# Allegro board LED_V1.0-1012.brd
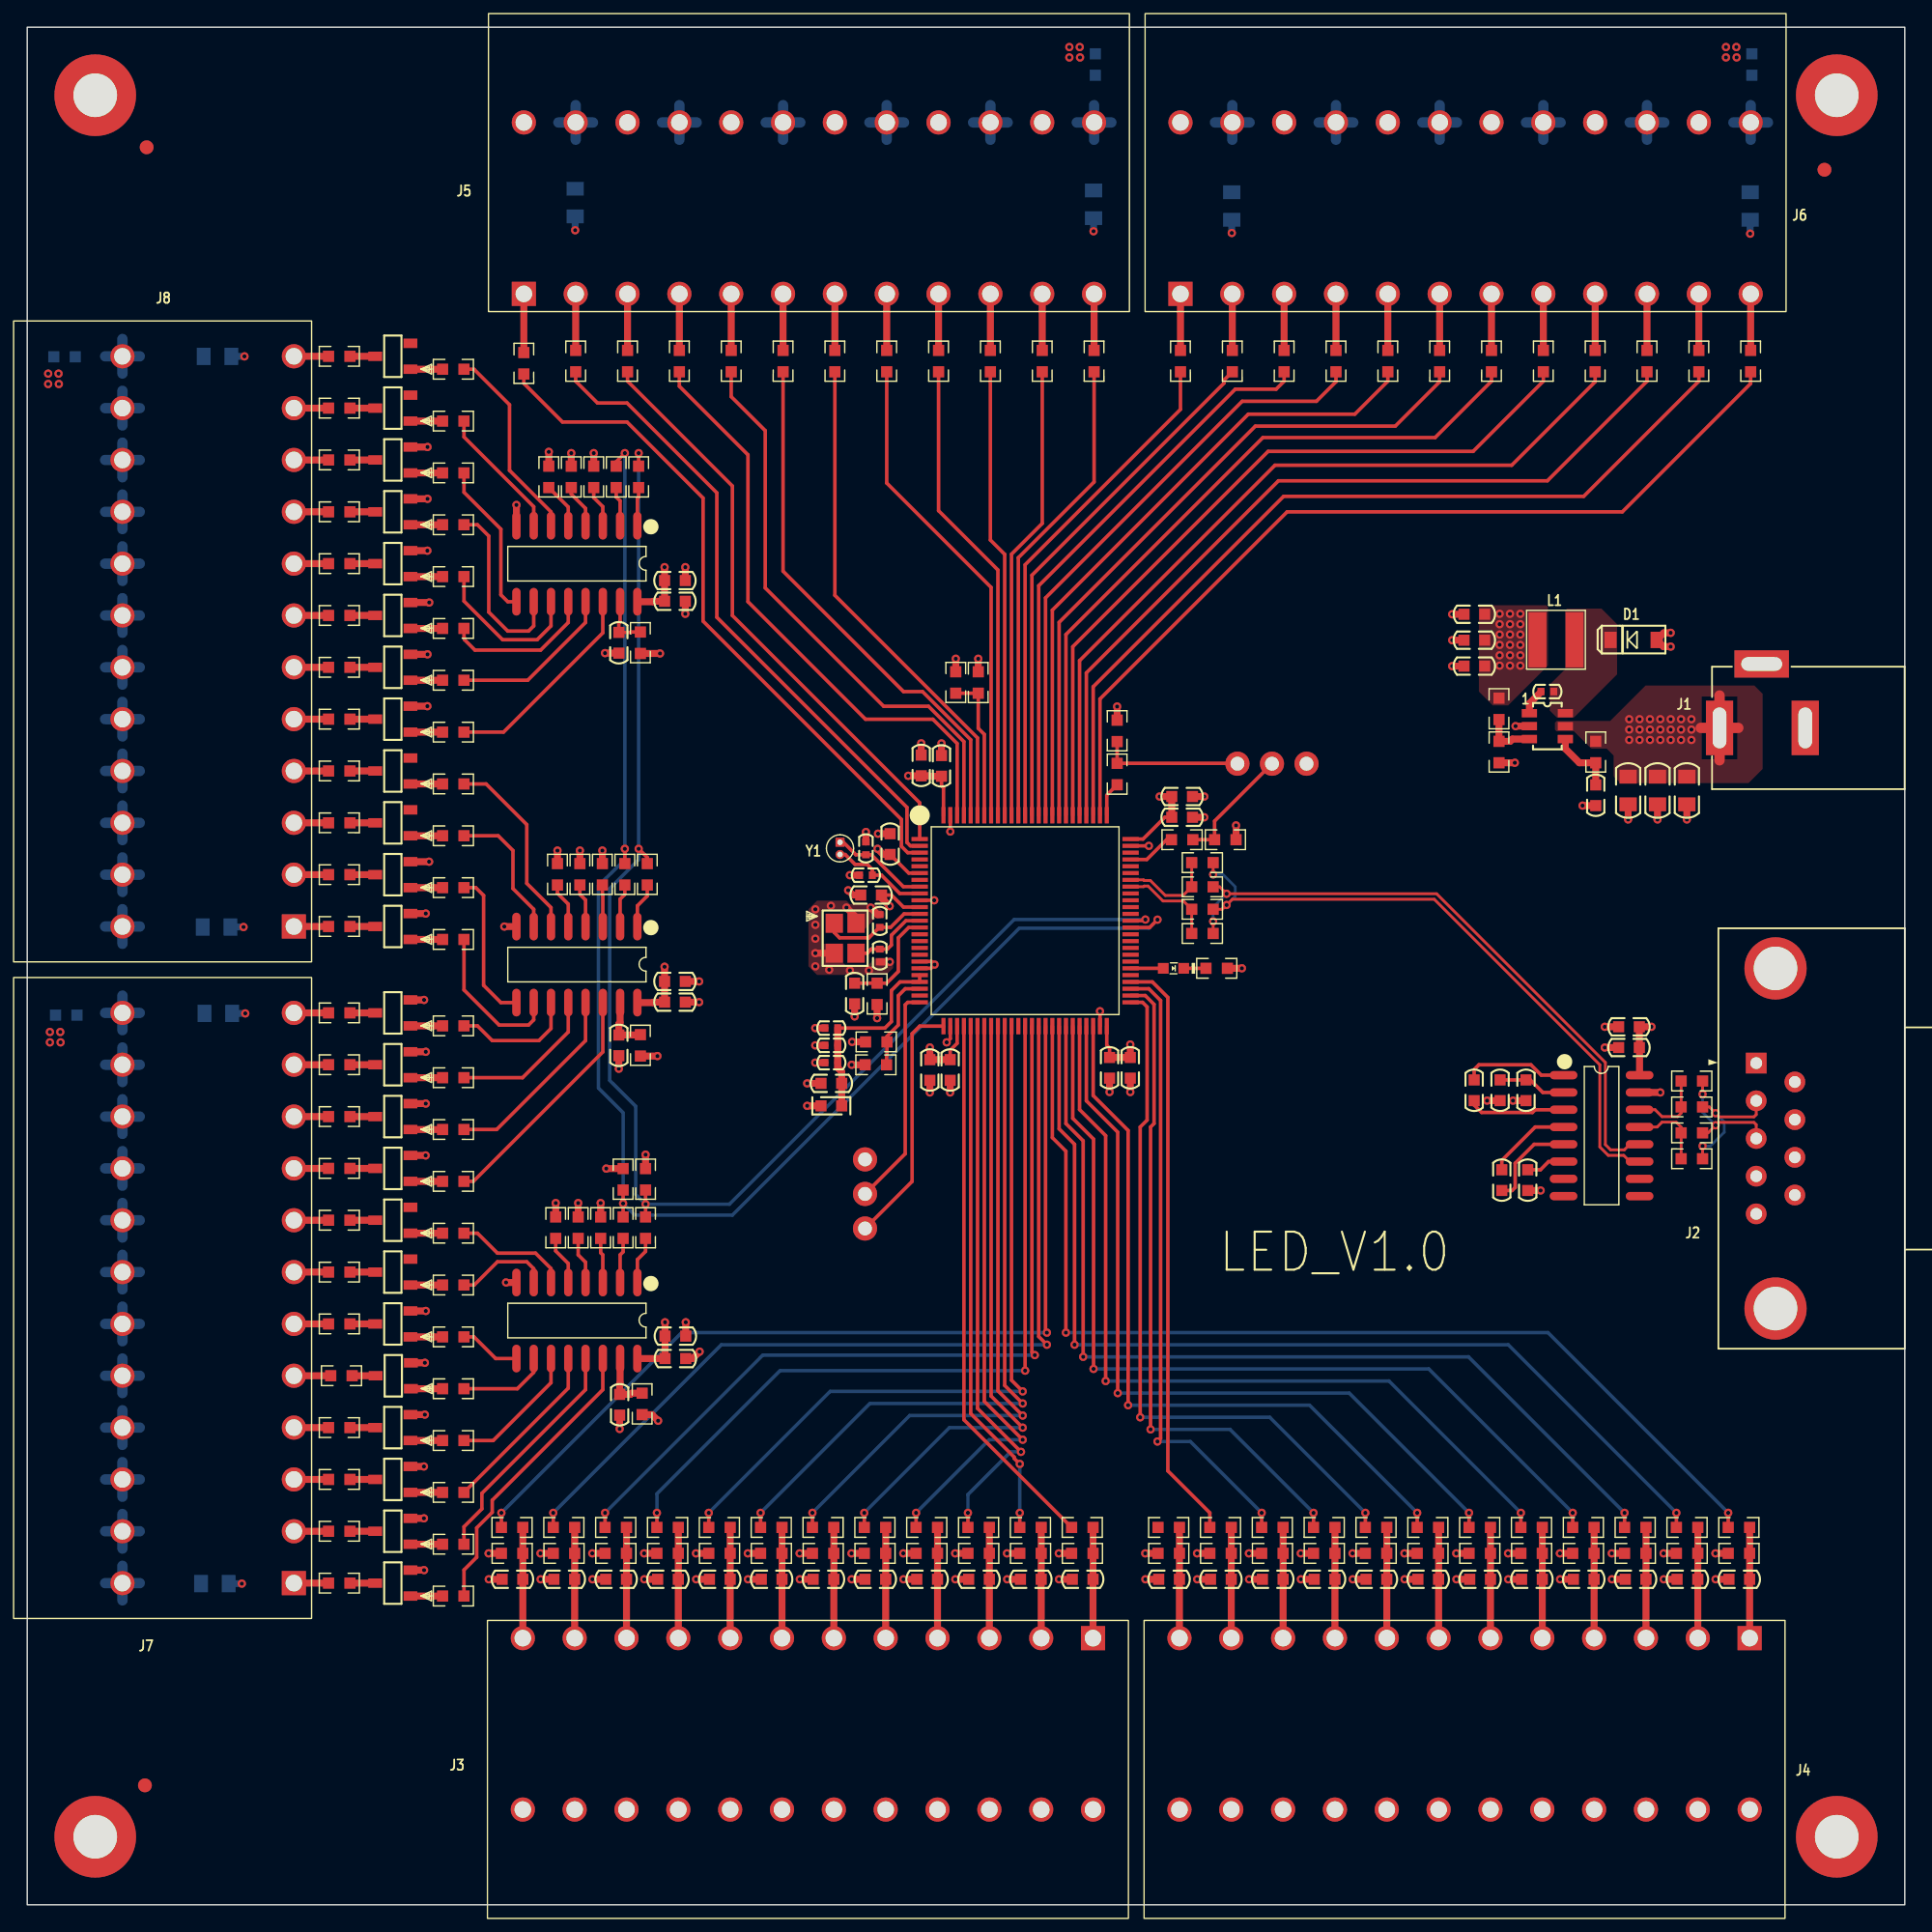
[diagram p0: board, top side]
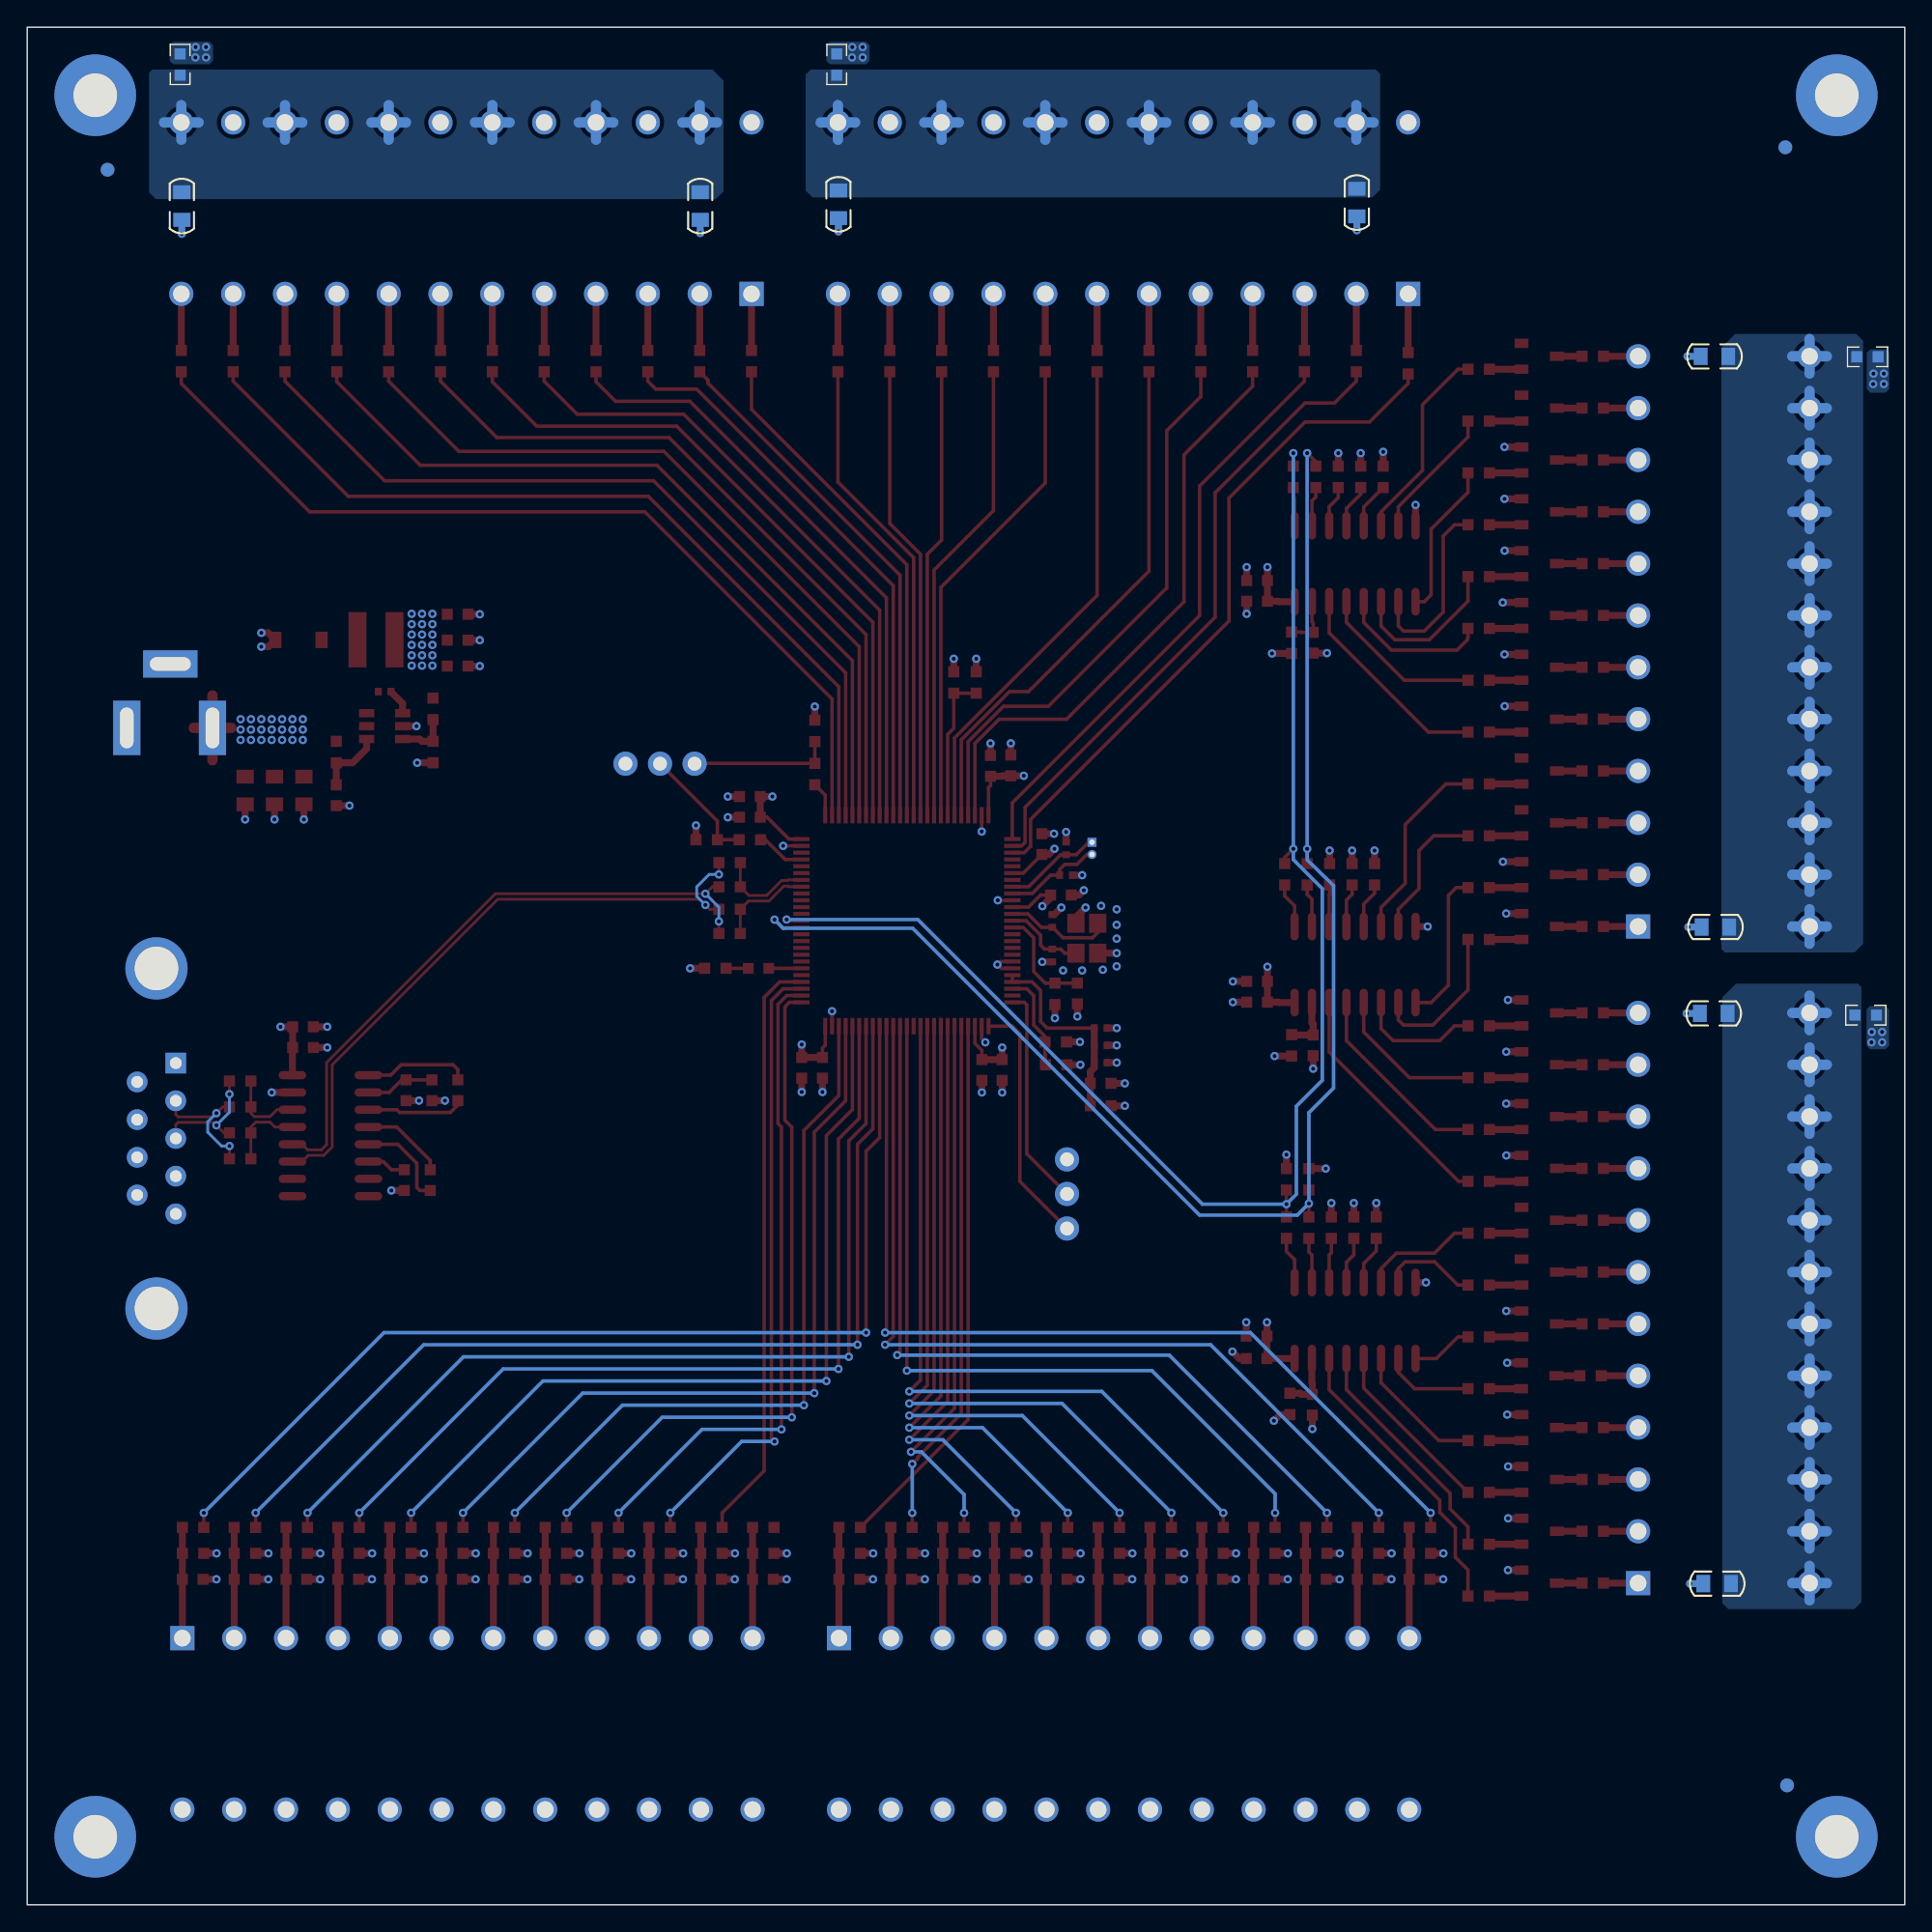
[diagram p1: board, bottom side, seen from below]

Outline 138 x 138 mm; copper layers: TOP, GND, VCC, BOTTOM. Coordinates in mm from the lower left corner of the outline.
Outline path: rectangle 0,0 138,138

## Design rules (mm)
net group DP1: nets RX TX
net group DP2: nets N9947380 N9947430
net group DP3: nets N9930446 N9930462
net group DP4: nets N9946592 N9946643

## Placement (name value [footprint] x y rotation side)
C1  100nF  [A183_C_0402_H50]  111.73 89.17 0 top
C2  1uF  [C0805]  121.98 81.9 270 top
C3  1uF  [C0805]  119.82 81.9 270 top
C4  1uF  [C0805]  117.67 81.9 270 top
C5  10uF  [C0603]  106.36 94.85 0 top
C6  10uF  [C0603]  106.36 92.95 0 top
C7  10uF  [C0603]  106.36 91.04 0 top
C8  100nF  [C0603]  117.73 63.01 180 top
C9  100nF  [C0603]  117.73 64.53 180 top
C10  100nF  [C0603]  108.25 59.87 270 top
C11  100nF  [C0603]  110.16 59.87 90 top
C12  100nF  [C0603]  106.35 59.87 270 top
C13  100nF  [C0603]  108.38 53.26 270 top
C14  100nF  [C0603]  110.28 53.26 270 top
C15  10pF  [C0402]  61.64 77.65 270 top
C16  10pF  [C0402]  61.64 75.68 0 top
C17  10pF  [C0402]  62.66 72.31 270 top
C18  10pF  [C0402]  62.66 69.77 90 top
C19  10uF  [C0603]  59.1 60.37 0 top
C20  0.10uF  [C0402]  59.1 61.9 0 top
C21  0.10uF  [C0402]  59.1 63.17 0 top
C22  0.10uF  [C0402]  59.1 64.44 0 top
C23  0.10uF  [C0603]  60.82 66.98 90 top
C24  10uF  [C0603]  79.55 61.52 90 top
C25  10uF  [C0603]  84.88 81.46 180 top
C26  10uF  [C0603]  81.07 61.52 90 top
C27  10uF  [C0603]  62.02 74.22 0 top
C28  10uF  [C0603]  65.71 83.74 270 top
C29  10uF  [C0603]  67.83 61.36 90 top
C30  10uF  [C0603]  67.2 83.71 270 top
C31  10uF  [C0603]  63.42 77.96 270 top
C32  10uF  [C0603]  66.34 61.36 90 top
C33  10uF  [C0603]  84.88 79.93 180 top
C34  100nF  [C0603]  77.57 23.92 180 top
C35  100nF  [C0603]  73.76 23.92 180 top
C36  100nF  [C0603]  69.95 23.92 180 top
C37  100nF  [C0603]  66.14 23.92 180 top
C38  100nF  [C0603]  62.33 23.92 180 top
C39  100nF  [C0603]  58.52 23.92 180 top
C40  100nF  [C0603]  54.71 23.92 180 top
C41  100nF  [C0603]  50.9 23.92 180 top
C42  100nF  [C0603]  47.09 23.92 180 top
C43  100nF  [C0603]  43.28 23.92 180 top
C44  100nF  [C0603]  39.47 23.92 180 top
C45  100nF  [C0603]  35.66 23.92 180 top
C46  100nF  [C0603]  125.83 23.92 180 top
C47  100nF  [C0603]  122.02 23.92 180 top
C48  100nF  [C0603]  118.21 23.92 180 top
C49  100nF  [C0603]  114.4 23.92 180 top
C50  100nF  [C0603]  110.59 23.92 180 top
C51  100nF  [C0603]  106.78 23.92 180 top
C52  100nF  [C0603]  102.97 23.92 180 top
C53  100nF  [C0603]  99.16 23.92 180 top
C54  100nF  [C0603]  95.35 23.92 180 top
C55  100nF  [C0603]  91.54 23.92 180 top
C56  100nF  [C0603]  87.73 23.92 180 top
C57  100nF  [C0603]  83.92 23.92 180 top
C58  100nF  [C0603]  47.64 41.8 0 top
C59  100nF  [C0603]  47.64 40.15 0 top
C60  100nF  [C0603]  43.54 36.75 270 top
C61  100nF  [C0603]  47.61 66.34 0 top
C62  100nF  [C0603]  47.61 67.87 0 top
C63  100nF  [C0603]  43.48 63.17 270 top
C64  100nF  [C0603]  47.61 95.81 0 top
C65  100nF  [C0603]  47.61 97.33 0 top
C66  100nF  [C0603]  43.48 92.76 270 top
C67  1uF  [C0805]  40.28 125.11 270 bottom
C68  1uF  [C0805]  78.38 124.98 270 bottom
C69  1uF  [C0805]  88.54 124.86 270 bottom
C70  1uF  [C0805]  126.64 124.86 270 bottom
C71  1uF  [C0805]  14.05 65.52 0 bottom
C72  1uF  [C0805]  13.79 23.61 0 bottom
C73  1uF  [C0805]  13.92 71.87 0 bottom
C74  1uF  [C0805]  13.99 113.81 0 bottom
D1  MBR0560T1  [SOD123-36X48]  118.07 92.97 0 top
FB1  600ohm  [L0603]  59.1 58.72 0 top
J1  -  [POWER_JACK]  131.51 86.5 0 top
J2  -  [DB9]  132.59 56.32 270 top
J3  12PIN*2  [2D5X2]  57.64 10.99 0 top
J4  12PIN*2  [2D5X2]  105.9 10.99 0 top
J5  12PIN*2  [2D5X2]  57.2 127.01 180 top
J6  12PIN*2  [2D5X2]  105.46 127.01 180 top
J7  12PIN*2  [2D5X2]  10.99 44.34 270 top
J8  12PIN*2  [2D5X2]  10.99 92.6 270 top
L1  22uH  [TSOT-6L]  112.36 92.98 270 top
LED1  LTST-C191KGKT  [LED0603]  84.25 68.83 180 top
NOREF  -  [unnamed]  132.1 127.52 0 top
NOREF#2  -  [unnamed#2]  133 133 0 top
NOREF#3  -  [unnamed#2]  5 133 0 top
NOREF#4  -  [unnamed]  8.65 8.78 0 top
NOREF#5  -  [unnamed]  8.78 129.18 0 top
NOREF#6  -  [unnamed#2]  133 5 0 top
NOREF#7  -  [unnamed#2]  5 5 0 top
NOREF#8  -  [unnamed]  132.1 127.52 180 bottom
NOREF#9  -  [unnamed]  8.65 8.78 180 bottom
NOREF#10  -  [unnamed]  8.78 129.18 180 bottom
PC1  NI/0.10uF  [C0603]  115.29 81.55 270 top
PU1  SN1501020DDCR  [SOT-23-6PS1]  111.73 86.63 270 top
Q1  SST3904  [A098_SOT23_3_H115]  26.87 23.64 180 top
Q2  SST3904  [A098_SOT23_3_H115]  26.87 27.45 180 top
Q3  SST3904  [A098_SOT23_3_H115]  26.87 31.26 180 top
Q4  SST3904  [A098_SOT23_3_H115]  26.87 35.07 180 top
Q5  SST3904  [A098_SOT23_3_H115]  26.91 38.88 180 top
Q6  SST3904  [A098_SOT23_3_H115]  26.87 42.69 180 top
Q7  SST3904  [A098_SOT23_3_H115]  26.87 46.5 180 top
Q8  SST3904  [A098_SOT23_3_H115]  26.87 50.31 180 top
Q9  SST3904  [A098_SOT23_3_H115]  26.87 54.12 180 top
Q10  SST3904  [A098_SOT23_3_H115]  26.87 57.93 180 top
Q11  SST3904  [A098_SOT23_3_H115]  26.87 61.74 180 top
Q12  SST3904  [A098_SOT23_3_H115]  26.87 65.55 180 top
Q13  SST3904  [A098_SOT23_3_H115]  26.87 71.9 180 top
Q14  SST3904  [A098_SOT23_3_H115]  26.87 75.71 180 top
Q15  SST3904  [A098_SOT23_3_H115]  26.87 79.52 180 top
Q16  SST3904  [A098_SOT23_3_H115]  26.87 83.33 180 top
Q17  SST3904  [A098_SOT23_3_H115]  26.87 87.14 180 top
Q18  SST3904  [A098_SOT23_3_H115]  26.87 90.95 180 top
Q19  SST3904  [A098_SOT23_3_H115]  26.87 94.76 180 top
Q20  SST3904  [A098_SOT23_3_H115]  26.87 98.57 180 top
Q21  SST3904  [A098_SOT23_3_H115]  26.87 102.38 180 top
Q22  SST3904  [A098_SOT23_3_H115]  26.87 106.19 180 top
Q23  SST3904  [A098_SOT23_3_H115]  26.87 110 180 top
Q24  SST3904  [A098_SOT23_3_H115]  26.87 113.81 180 top
R1  10k  [R0603]  115.29 84.73 270 top
R2  33.2k  [R0603]  108.17 87.9 270 top
R3  10k  [R0603]  108.17 84.73 270 top
R4  NI/100k  [R0603]  122.35 60.55 0 top
R5  NI/100k  [R0603]  122.35 58.64 0 top
R6  NI/100k  [R0603]  122.35 56.74 0 top
R7  NI/100k  [R0603]  122.35 54.83 0 top
R8  NI/100k  [R0603]  80.11 83.11 90 top
R9  NI/100k  [R0603]  84.88 78.28 0 top
R10  NI/100k  [R0603]  86.38 76.6 0 top
R11  NI/100k  [R0603]  86.38 74.82 0 top
R12  NI/100k  [R0603]  86.38 73.17 0 top
R13  NI/100k  [R0603]  86.38 71.39 0 top
R14  100k  [R0603]  62.47 66.95 90 top
R15  NI/100k  [R0603]  68.25 89.84 270 top
R16  100k  [R0603]  69.9 89.84 90 top
R17  NI/100k  [R0603]  62.41 63.42 0 top
R18  100k  [R0603]  62.37 61.74 180 top
R19  NI/100k  [R0603]  80.11 86.28 270 top
R20  NI/100k  [R0603]  88.06 78.28 180 top
R21  NI/100k  [R0603]  87.42 68.83 180 top
R22  33.2k  [R0603]  77.55 25.83 180 top
R23  33.2k  [R0603]  73.74 25.83 180 top
R24  33.2k  [R0603]  69.93 25.83 180 top
R25  33.2k  [R0603]  66.12 25.83 180 top
R26  33.2k  [R0603]  62.31 25.83 180 top
R27  33.2k  [R0603]  58.5 25.83 180 top
R28  33.2k  [R0603]  54.69 25.83 180 top
R29  33.2k  [R0603]  50.88 25.83 180 top
R30  33.2k  [R0603]  47.07 25.83 180 top
R31  33.2k  [R0603]  43.26 25.83 180 top
R32  33.2k  [R0603]  39.45 25.83 180 top
R33  33.2k  [R0603]  35.64 25.83 180 top
R34  33.2k  [R0603]  77.55 27.73 0 top
R35  33.2k  [R0603]  73.74 27.73 0 top
R36  33.2k  [R0603]  69.93 27.73 0 top
R37  33.2k  [R0603]  66.12 27.73 0 top
R38  33.2k  [R0603]  62.31 27.73 0 top
R39  33.2k  [R0603]  58.5 27.73 0 top
R40  33.2k  [R0603]  54.69 27.73 0 top
R41  33.2k  [R0603]  50.88 27.73 0 top
R42  33.2k  [R0603]  47.07 27.73 0 top
R43  33.2k  [R0603]  43.26 27.73 0 top
R44  33.2k  [R0603]  39.45 27.73 0 top
R45  33.2k  [R0603]  35.64 27.73 0 top
R46  33.2k  [R0603]  125.81 25.83 180 top
R47  33.2k  [R0603]  122 25.83 180 top
R48  33.2k  [R0603]  118.19 25.83 180 top
R49  33.2k  [R0603]  114.38 25.83 180 top
R50  33.2k  [R0603]  110.57 25.83 180 top
R51  33.2k  [R0603]  106.76 25.83 180 top
R52  33.2k  [R0603]  102.95 25.83 180 top
R53  33.2k  [R0603]  99.14 25.83 180 top
R54  33.2k  [R0603]  95.33 25.83 180 top
R55  33.2k  [R0603]  91.52 25.83 180 top
R56  33.2k  [R0603]  87.71 25.83 180 top
R57  33.2k  [R0603]  83.9 25.83 180 top
R58  33.2k  [R0603]  125.81 27.73 0 top
R59  33.2k  [R0603]  122 27.73 0 top
R60  33.2k  [R0603]  118.19 27.73 0 top
R61  33.2k  [R0603]  114.38 27.73 0 top
R62  33.2k  [R0603]  110.57 27.73 0 top
R63  33.2k  [R0603]  106.76 27.73 0 top
R64  33.2k  [R0603]  102.95 27.73 0 top
R65  33.2k  [R0603]  99.14 27.73 0 top
R66  33.2k  [R0603]  95.33 27.73 0 top
R67  33.2k  [R0603]  91.52 27.73 0 top
R68  33.2k  [R0603]  87.71 27.73 0 top
R69  33.2k  [R0603]  83.9 27.73 0 top
R70  33.2k  [R0603]  36.5 113.3 90 top
R71  33.2k  [R0603]  40.31 113.46 90 top
R72  33.2k  [R0603]  44.12 113.46 90 top
R73  33.2k  [R0603]  47.93 113.46 90 top
R74  33.2k  [R0603]  51.74 113.46 90 top
R75  33.2k  [R0603]  55.55 113.46 90 top
R76  33.2k  [R0603]  59.36 113.46 90 top
R77  33.2k  [R0603]  63.17 113.46 90 top
R78  33.2k  [R0603]  66.98 113.46 90 top
R79  33.2k  [R0603]  70.79 113.46 90 top
R80  33.2k  [R0603]  74.6 113.46 90 top
R81  33.2k  [R0603]  78.41 113.46 90 top
R82  33.2k  [R0603]  92.38 113.46 90 top
R83  33.2k  [R0603]  96.19 113.46 90 top
R84  33.2k  [R0603]  84.76 113.46 90 top
R85  33.2k  [R0603]  88.57 113.46 90 top
R86  33.2k  [R0603]  100 113.46 90 top
R87  33.2k  [R0603]  103.81 113.46 90 top
R88  33.2k  [R0603]  107.62 113.46 90 top
R89  33.2k  [R0603]  111.43 113.46 90 top
R90  33.2k  [R0603]  115.24 113.46 90 top
R91  33.2k  [R0603]  119.05 113.46 90 top
R92  33.2k  [R0603]  122.86 113.46 90 top
R93  33.2k  [R0603]  126.67 113.46 90 top
R94  33.2k  [R0603]  22.94 23.64 180 top
R95  33.2k  [R0603]  22.94 71.9 180 top
R96  33.2k  [R0603]  22.94 27.45 180 top
R97  33.2k  [R0603]  22.94 75.71 180 top
R98  33.2k  [R0603]  22.94 31.26 180 top
R99  33.2k  [R0603]  22.94 79.52 180 top
R100  33.2k  [R0603]  22.94 35.07 180 top
R101  33.2k  [R0603]  22.94 83.33 180 top
R102  33.2k  [R0603]  23.1 38.88 180 top
R103  33.2k  [R0603]  22.94 87.14 180 top
R104  33.2k  [R0603]  22.94 42.69 180 top
R105  33.2k  [R0603]  22.94 90.95 180 top
R106  33.2k  [R0603]  22.94 46.5 180 top
R107  33.2k  [R0603]  22.94 94.76 180 top
R108  33.2k  [R0603]  22.94 50.31 180 top
R109  33.2k  [R0603]  22.94 98.57 180 top
R110  33.2k  [R0603]  22.94 54.12 180 top
R111  33.2k  [R0603]  22.94 102.38 180 top
R112  33.2k  [R0603]  22.94 57.93 180 top
R113  33.2k  [R0603]  22.94 106.19 180 top
R114  33.2k  [R0603]  22.94 61.74 180 top
R115  33.2k  [R0603]  22.94 110 180 top
R116  33.2k  [R0603]  22.94 65.55 180 top
R117  33.2k  [R0603]  22.94 113.81 180 top
R118  33.2k  [R0603]  45.45 53.32 270 top
R119  33.2k  [R0603]  43.8 53.32 270 top
R120  33.2k  [R0603]  45.45 49.77 90 top
R121  33.2k  [R0603]  43.8 49.77 90 top
R122  33.2k  [R0603]  42.15 49.77 90 top
R123  33.2k  [R0603]  40.5 49.77 90 top
R124  33.2k  [R0603]  38.84 49.77 90 top
R125  33.2k  [R0603]  45.19 36.81 270 top
R126  33.2k  [R0603]  45.58 75.74 90 top
R127  33.2k  [R0603]  43.93 75.74 90 top
R128  33.2k  [R0603]  42.27 75.74 90 top
R129  33.2k  [R0603]  40.62 75.74 90 top
R130  33.2k  [R0603]  38.97 75.74 90 top
R131  33.2k  [R0603]  45.07 63.17 270 top
R132  33.2k  [R0603]  44.94 104.95 90 top
R133  33.2k  [R0603]  43.29 104.95 90 top
R134  33.2k  [R0603]  41.64 104.95 90 top
R135  33.2k  [R0603]  39.99 104.95 90 top
R136  33.2k  [R0603]  38.34 104.95 90 top
R137  33.2k  [R0603]  45.07 92.76 270 top
R138  33.2k  [R0603]  78.5 135.26 270 bottom
R139  33.2k  [R0603]  126.76 135.26 270 bottom
R140  33.2k  [R0603]  2.87 65.39 0 bottom
R141  33.2k  [R0603]  2.74 113.78 0 bottom
R143  33.2k  [R0603]  31.32 56.98 180 top
R144  33.2k  [R0603]  31.32 60.79 180 top
R145  33.2k  [R0603]  31.32 64.6 180 top
R146  33.2k  [R0603]  31.32 53.17 180 top
R147  33.2k  [R0603]  31.32 74.76 180 top
R148  33.2k  [R0603]  31.32 78.57 180 top
R149  33.2k  [R0603]  31.32 82.38 180 top
R150  33.2k  [R0603]  31.32 70.95 180 top
R151  33.2k  [R0603]  31.32 90 180 top
R152  33.2k  [R0603]  31.32 93.81 180 top
R153  33.2k  [R0603]  31.32 97.62 180 top
R154  33.2k  [R0603]  31.32 86.19 180 top
R155  33.2k  [R0603]  31.32 105.24 180 top
R156  33.2k  [R0603]  31.32 109.05 180 top
R157  33.2k  [R0603]  31.32 112.86 180 top
R158  33.2k  [R0603]  31.32 101.43 180 top
R159  33.2k  [R0603]  31.32 26.5 180 top
R160  33.2k  [R0603]  31.32 30.31 180 top
R161  33.2k  [R0603]  31.32 34.12 180 top
R162  33.2k  [R0603]  31.32 22.69 180 top
R163  33.2k  [R0603]  31.32 41.74 180 top
R164  33.2k  [R0603]  31.32 45.55 180 top
R165  33.2k  [R0603]  31.32 49.36 180 top
R166  33.2k  [R0603]  31.32 37.93 180 top
TP1  TEST POINT  [HOLE]  88.95 83.87 90 top
TP2  TEST POINT  [HOLE]  91.49 83.87 90 top
TP3  TEST POINT  [HOLE]  61.58 49.71 180 top
TP4  TEST POINT  [HOLE]  61.58 52.25 180 top
TP5  TEST POINT  [HOLE]  94.03 83.87 90 top
TP6  TEST POINT  [HOLE]  61.58 54.79 180 top
U1  MAX3232  [TSSOP16]  115.71 56.53 0 top
U2  STM32F103VET  [LQFP100]  73.35 72.33 0 top
U3  PCA9557PW  [TSSOP16]  40.4 42.94 270 top
U4  PCA9557PW  [TSSOP16]  40.4 69.1 270 top
U5  PCA9557PW  [TSSOP16]  40.4 98.57 270 top
Y1  32.768KHz  [OSC-1_5X3_2-2P-RF]  59.74 77.65 270 top
Y2  24MHz  [OSC-3_2X2_5-4P]  60.12 71.04 270 top

## Library data of the parts
C1 = CAP NP_1
C2-C14 C34-C74 = CAP NP_0
C15-C33 PC1 = C
D1 = DIODE_SCHTKY_0
FB1 = FB
J1 = POWER_JACK_0
J2 = DB9
J3-J8 = 12PIN*2
L1 = L
LED1 = LED-2P-Green
PU1 = SN1504026DDCR_SOT23_0
Q1-Q24 = NPN
R1-R141 R143-R166 = R
TP1-TP6 = TEST POINT_5
U1 = MAX3232
U2 = STM32F103VET
U3-U5 = PCA9557PW
Y1 = XTAL-2P
Y2 = XTAL-4P

## Footprints (pads in the part's own frame, mm; a bottom-side part is the same pattern mirrored in y, then rotated)
2D5X2
  rect 1.778x1.778 hole 1.219: 1(20.701,8.609)
  round 1.778 hole 1.219: 2(16.891,8.609) 3(13.081,8.609) 4(9.271,8.609) 5(5.461,8.609) 6(1.651,8.609) 7(-2.159,8.609) 8(-5.969,8.609) 9(-9.779,8.609) 10(-13.589,8.609) 11(-17.399,8.609) 12(-21.209,8.609) 13(-21.209,-3.991) 14(-17.399,-3.991) 15(-13.589,-3.991) 16(-9.779,-3.991) 17(-5.969,-3.991) 18(-2.159,-3.991) 19(1.651,-3.991) 20(5.461,-3.991) 21(9.271,-3.991) 22(13.081,-3.991) 23(16.891,-3.991) 24(20.701,-3.991)
A098_SOT23_3_H115
  rect 1.016x0.686 smd: 1(-1.295,0.953) 2(-1.295,-0.953) 3(1.295,0)
A183_C_0402_H50
  rect 0.508x0.559 smd: 1(-0.47,0) 2(0.47,0)
C0402
  rect 0.508x0.559 smd: 1(-0.47,0) 2(0.47,0)
C0603
  rect 0.813x0.813 smd: 1(-0.762,0) 2(0.762,0)
C0805
  rect 1.016x1.27 smd: 1(-1.016,0) 2(1.016,0)
DB9
  rect 1.524x1.524 hole 0.864: 1(-5.54,-5.514)
  round 1.524 hole 0.864: 2(-2.77,-5.514) 3(0,-5.514) 4(2.77,-5.514) 5(5.54,-5.514) 6(-4.155,-2.674) 7(-1.385,-2.674) 8(1.385,-2.674) 9(4.155,-2.674)
  round 4.572 hole 3.2: 10(-12.5,-4.094) 11(12.5,-4.094)
HOLE
  round 1.778 hole 1.016: 1(0,0)
L0603
  rect 0.813x0.813 smd: 1(-0.762,0) 2(0.762,0)
LED0603
  rect 0.787x0.787 smd: 1(-0.75,0) 2(0.75,0)
LQFP100
  rect 1.2x0.3 smd: 1(-7.75,6) 2(-7.75,5.5) 3(-7.75,5) 4(-7.75,4.5) 5(-7.75,4) 6(-7.75,3.5) 7(-7.75,3) 8(-7.75,2.5) 9(-7.75,2) 10(-7.75,1.5) 11(-7.75,1) 12(-7.75,0.5) 13(-7.75,0) 14(-7.75,-0.5) 15(-7.75,-1) 16(-7.75,-1.5) 17(-7.75,-2) 18(-7.75,-2.5) 19(-7.75,-3) 20(-7.75,-3.5) 21(-7.75,-4) 22(-7.75,-4.5) 23(-7.75,-5) 24(-7.75,-5.5) 25(-7.75,-6) 51(7.75,-6) 52(7.75,-5.5) 53(7.75,-5) 54(7.75,-4.5) 55(7.75,-4) 56(7.75,-3.5) 57(7.75,-3) 58(7.75,-2.5) 59(7.75,-2) 60(7.75,-1.5) 61(7.75,-1) 62(7.75,-0.5) 63(7.75,0) 64(7.75,0.5) 65(7.75,1) 66(7.75,1.5) 67(7.75,2) 68(7.75,2.5) 69(7.75,3) 70(7.75,3.5) 71(7.75,4) 72(7.75,4.5) 73(7.75,5) 74(7.75,5.5) 75(7.75,6)
  rect 0.3x1.2 smd: 26(-6,-7.75) 27(-5.5,-7.75) 28(-5,-7.75) 29(-4.5,-7.75) 30(-4,-7.75) 31(-3.5,-7.75) 32(-3,-7.75) 33(-2.5,-7.75) 34(-2,-7.75) 35(-1.5,-7.75) 36(-1,-7.75) 37(-0.5,-7.75) 38(0,-7.75) 39(0.5,-7.75) 40(1,-7.75) 41(1.5,-7.75) 42(2,-7.75) 43(2.5,-7.75) 44(3,-7.75) 45(3.5,-7.75) 46(4,-7.75) 47(4.5,-7.75) 48(5,-7.75) 49(5.5,-7.75) 50(6,-7.75) 76(6,7.75) 77(5.5,7.75) 78(5,7.75) 79(4.5,7.75) 80(4,7.75) 81(3.5,7.75) 82(3,7.75) 83(2.5,7.75) 84(2,7.75) 85(1.5,7.75) 86(1,7.75) 87(0.5,7.75) 88(0,7.75) 89(-0.5,7.75) 90(-1,7.75) 91(-1.5,7.75) 92(-2,7.75) 93(-2.5,7.75) 94(-3,7.75) 95(-3.5,7.75) 96(-4,7.75) 97(-4.5,7.75) 98(-5,7.75) 99(-5.5,7.75) 100(-6,7.75)
OSC-1_5X3_2-2P-RF
  rect 0.66x0.66 hole 0.406: 1(-0.45,0)
  round 0.66 hole 0.406: 2(0.45,0)
OSC-3_2X2_5-4P
  rect 1.397x1.27 smd: 1(-1.1,-0.8) 2(1.1,-0.8) 3(1.1,0.8) 4(-1.1,0.8)
POWER_JACK
  rect 2x4 hole 1x3: A(-7.125,0) B(-0.825,0)
  rect 4x2 hole 3x1: C(-4.025,4.7)
R0603
  rect 0.82x0.82 smd: 1(0.787,0) 2(-0.787,0)
SOD123-36X48
  rect 0.9x1.2 smd: 1(-1.7,0) 2(1.7,0)
SOT-23-6PS1
  rect 0.61x1.118 smd: 1(-0.95,-1.321) 2(0,-1.321) 3(0.95,-1.321) 4(0.95,1.321) 5(0,1.321) 6(-0.95,1.321)
TSOT-6L
  rect 4.064x1.321 smd: 1(0,1.36) 2(0,-1.36)
TSSOP16
  oval 2.032x0.61 smd: 1(-2.794,4.445) 2(-2.794,3.175) 3(-2.794,1.905) 4(-2.794,0.635) 5(-2.794,-0.635) 6(-2.794,-1.905) 7(-2.794,-3.175) 8(-2.794,-4.445) 9(2.794,-4.445) 10(2.794,-3.175) 11(2.794,-1.905) 12(2.794,-0.635) 13(2.794,0.635) 14(2.794,1.905) 15(2.794,3.175) 16(2.794,4.445)
unnamed
  round 1.016 smd: 1(0,0)
unnamed#2
  round 6 hole 3.2: 1(0,0)

## Nets
GND: C2.2 C3.2 C4.2 C5.1 C6.1 C7.1 C8.2 C9.2 C10.2 C14.2 C15.1 C16.1 C17.1 C18.1 C19.1 C20.1 C21.1 C22.1 C23.1 C24.1 C25.1 C26.1 C27.1 C28.1 C29.1 C30.1 C31.1 C32.1 C33.1 C34.2 C35.2 C36.2 C37.2 C38.2 C39.2 C40.2 C41.2 C42.2 C43.2 C44.2 C45.2 C46.2 C47.2 C48.2 C49.2 C50.2 C51.2 C52.2 C53.2 C54.2 C55.2 C56.2 C57.2 C58.2 C59.2 C60.2 C61.2 C62.2 C63.2 C64.2 C65.2 C66.2 C67.2 C68.2 C69.2 C70.2 C71.2 C72.2 C73.2 C74.2 D1.2(A) J1.B J2.5 J2.10 J2.11 J3.13 J3.14 J3.15 J3.16 J3.17 J3.18 J3.19 J3.20 J3.21 J3.22 J3.23 J3.24 J4.13 J4.14 J4.15 J4.16 J4.17 J4.18 J4.19 J4.20 J4.21 J4.22 J4.23 J4.24 J5.14 J5.16 J5.18 J5.20 J5.22 J5.24 J6.14 J6.16 J6.18 J6.20 J6.22 J6.24 PC1.2 PU1.2(GND) Q1.2(E) Q2.2(E) Q3.2(E) Q4.2(E) Q5.2(E) Q6.2(E) Q9.2(E) Q10.2(E) Q11.2(E) Q12.2(E) Q13.2(E) Q14.2(E) Q17.2(E) Q18.2(E) Q19.2(E) Q20.2(E) Q21.2(E) Q22.2(E) R3.1 R16.1 R18.1 R128.1 R134.1 R135.1 TP5.1 TP6.1 U1.15(GND) U2.10(VSS_5) U2.19(VSSA) U2.20(VREF-) U2.27(VSS_4) U2.49(VSS_1) U2.74(VSS_2) U2.99(VSS_3) U3.8(VSS) U4.8(VSS) U5.8(VSS) Y2.2 Y2.4
VCC_3V3: C5.2 C6.2 C7.2 C8.1 C9.1 C11.1 C24.2 C25.2 C26.2 C27.2 C28.2 C29.2 C30.2 C31.2 C32.2 C33.2 C58.1 C59.1 C61.1 C62.1 C64.1 C65.1 FB1.1 L1.2 R2.2 R14.2 R15.2 R17.2 R19.2 R20.2 R21.2 R22.1 R23.1 R24.1 R25.1 R26.1 R27.1 R28.1 R29.1 R30.1 R31.1 R32.1 R33.1 R46.1 R47.1 R48.1 R49.1 R50.1 R51.1 R52.1 R53.1 R54.1 R55.1 R56.1 R57.1 R118.2 R119.2 R122.1 R123.1 R124.1 R125.1 R129.1 R130.1 R131.1 R136.1 R137.1 U1.16(VCC) U2.6(VBAT) U2.11(VDD_5) U2.28(VDD_4) U2.50(VDD_1) U2.75(VDD_2) U2.100(VDD_3) U3.16(VDD) U4.16(VDD) U5.16(VDD)
VCC_12V: C2.1 C3.1 C4.1 J1.A PU1.5(VIN) R1.2 R138.2 R139.2 R140.2 R141.2
VCC_12V_LED1: C71.1 C72.1 J7.13 J7.14 J7.15 J7.16 J7.17 J7.18 J7.19 J7.20 J7.21 J7.22 J7.23 J7.24 R140.1
VCC_12V_LED2: C73.1 C74.1 J8.13 J8.14 J8.15 J8.16 J8.17 J8.18 J8.19 J8.20 J8.21 J8.22 J8.23 J8.24 R141.1
BOOT0: R15.1 R16.2 U2.94(BOOT0)
CLK_24M_IN: C17.2 U2.12(OSC_IN) Y2.1
CLK_24M_OUT: C18.2 U2.13(OSC_OUT) Y2.3
CLK_32K768_IN: C15.2 U2.8(PC14-OSC32_IN) Y1.1
CLK_32K768_OUT: C16.2 U2.9(PC15-OSC32_OUT) Y1.2
DEBUG_RX: TP3.1 U2.26(PA3)
DEBUG_TX: TP4.1 U2.25(PA2)
IIC_SCL: R118.1 R120.1 R126.1 R132.1 U2.63(PC6)
IIC_SDA: R119.1 R121.1 R127.1 R133.1 U2.62(PD15)
KEY_1: R34.2 U2.29(PA4)
KEY_2: R35.2 U2.30(PA5)
KEY_3: R36.2 U2.31(PA6)
KEY_4: R37.2 U2.32(PA7)
KEY_5: R38.2 U2.33(PC4)
KEY_6: R39.2 U2.34(PC5)
KEY_7: R40.2 U2.35(PB0)
KEY_8: R41.2 U2.36(PB1)
KEY_9: R42.2 U2.38(PE7)
KEY_10: R43.2 U2.39(PE8)
KEY_11: R44.2 U2.40(PE9)
KEY_12: R45.2 U2.41(PE10)
KEY_13: R58.2 U2.42(PE11)
KEY_14: R59.2 U2.43(PE12)
KEY_15: R60.2 U2.44(PE13)
KEY_16: R61.2 U2.45(PE14)
KEY_17: R62.2 U2.46(PE15)
KEY_18: R63.2 U2.47(PB10)
KEY_19: R64.2 U2.48(PB11)
KEY_20: R65.2 U2.51(PB12)
KEY_21: R66.2 U2.52(PB13)
KEY_22: R67.2 U2.53(PB14)
KEY_23: R68.2 U2.54(PB15)
KEY_24: U2.55(PD8)
KEY_LED_1: Q1.3(C) R94.2
KEY_LED_2: Q2.3(C) R96.2
KEY_LED_3: Q3.3(C) R98.2
KEY_LED_4: Q4.3(C) R100.2
KEY_LED_5: Q5.3(C) R102.2
KEY_LED_6: Q6.3(C) R104.2
KEY_LED_7: Q7.3(C) R106.2
KEY_LED_8: Q8.3(C) R108.2
KEY_LED_9: Q9.3(C) R110.2
KEY_LED_10: Q10.3(C) R112.2
KEY_LED_11: Q11.3(C) R114.2
KEY_LED_12: Q12.3(C) R116.2
KEY_LED_13: Q13.3(C) R95.2
KEY_LED_14: Q14.3(C) R97.2
KEY_LED_15: Q15.3(C) R99.2
KEY_LED_16: Q16.3(C) R101.2
KEY_LED_17: Q17.3(C) R103.2
KEY_LED_18: Q18.3(C) R105.2
KEY_LED_19: Q19.3(C) R107.2
KEY_LED_20: Q20.3(C) R109.2
KEY_LED_21: Q21.3(C) R111.2
KEY_LED_22: Q22.3(C) R113.2
KEY_LED_23: Q23.3(C) R115.2
KEY_LED_24: Q24.3(C) R117.2
LED: LED1.2(C) U2.56(PD9)
LED_1: R70.2 U2.3(PE4)
LED_2: R71.2 U2.2(PE3)
LED_3: R72.2 U2.1(PE2)
LED_4: R73.2 U2.98(PE1)
LED_5: R74.2 U2.97(PE0)
LED_6: R75.2 U2.96(PB9)
LED_7: R76.2 U2.95(PB8)
LED_8: R77.2 U2.93(PB7)
LED_9: R78.2 U2.92(PB6)
LED_10: R79.2 U2.91(PB5)
LED_11: R80.2 U2.90(PB4)
LED_12: R81.2 U2.89(PB3)
LED_13: R84.2 U2.88(PD7)
LED_14: R85.2 U2.87(PD6)
LED_15: R82.2 U2.86(PD5)
LED_16: R83.2 U2.85(PD4)
LED_17: R86.2 U2.84(PD3)
LED_18: R87.2 U2.83(PD2)
LED_19: R88.2 U2.82(PD1)
LED_20: R89.2 U2.81(PD0)
LED_21: R90.2 U2.80(PC12)
LED_22: R91.2 U2.79(PC11)
LED_23: R92.2 U2.78(PC10)
LED_24: R93.2 U2.77(PA15)
LED_CL_1: Q1.1(B) R162.1
LED_CL_2: Q2.1(B) R159.1
LED_CL_3: Q3.1(B) R160.1
LED_CL_4: Q4.1(B) R161.1
LED_CL_5: Q5.1(B) R166.1
LED_CL_6: Q6.1(B) R163.1
LED_CL_7: Q7.1(B) R164.1
LED_CL_8: Q8.1(B) R165.1
LED_CL_9: Q9.1(B) R146.1
LED_CL_10: Q10.1(B) R143.1
LED_CL_11: Q11.1(B) R144.1
LED_CL_12: Q12.1(B) R145.1
LED_CL_13: Q13.1(B) R150.1
LED_CL_14: Q14.1(B) R147.1
LED_CL_15: Q15.1(B) R148.1
LED_CL_16: Q16.1(B) R149.1
LED_CL_17: Q17.1(B) R154.1
LED_CL_18: Q18.1(B) R151.1
LED_CL_19: Q19.1(B) R152.1
LED_CL_20: Q20.1(B) R153.1
LED_CL_21: Q21.1(B) R158.1
LED_CL_22: Q22.1(B) R155.1
LED_CL_23: Q23.1(B) R156.1
LED_CL_24: Q24.1(B) R157.1
RESET_N: C23.2 R14.1 U2.14(NRST)
RX: R11.1 R13.1 U1.12(R1OUT)
SWCLK: R8.1 R19.1 TP1.1
SWSDIO: R9.1 R20.1 TP2.1
TX: R10.1 R12.1 U1.11(T1IN)
WAKE: R17.1 R18.2 U2.23(PA0-WKUP)
N00526: C1.2 D1.1(C) L1.1 PU1.6(SW)
N00530: PC1.1 PU1.4(\\S\H\D\N) R1.1
N00636: PU1.3(VFB) R2.1 R3.2
N00810: C1.1 PU1.1(CB)
N9918491: C19.2 C20.2 C21.2 C22.2 FB1.2 U2.21(VREF+) U2.22(VDDA)
N9930204: C12.1 U1.1(C1+)
N9930224: C12.2 U1.3(C1-)
N9930232: C13.1 U1.4(C2+)
N9930252: C13.2 U1.5(C2-)
N9930268: C14.1 U1.6(V-)
N9930340: C10.1 C11.2 U1.2(V+)
N9930446: R4.2 R5.2 U1.14(T1OUT)
N9930462: R6.2 R7.2 U1.13(R1IN)
N9933022: R69.2
N9933455: C34.1 J3.1 R22.2 R34.1
N9933457: C35.1 J3.2 R23.2 R35.1
N9933459: C36.1 J3.3 R24.2 R36.1
N9933461: C37.1 J3.4 R25.2 R37.1
N9933463: C38.1 J3.5 R26.2 R38.1
N9933465: C39.1 J3.6 R27.2 R39.1
N9933467: C40.1 J3.7 R28.2 R40.1
N9933469: C41.1 J3.8 R29.2 R41.1
N9933471: C42.1 J3.9 R30.2 R42.1
N9933473: C43.1 J3.10 R31.2 R43.1
N9933475: C44.1 J3.11 R32.2 R44.1
N9933477: C45.1 J3.12 R33.2 R45.1
N9936434: C46.1 J4.1 R46.2 R58.1
N9936438: C47.1 J4.2 R47.2 R59.1
N9936442: C48.1 J4.3 R48.2 R60.1
N9936446: C49.1 J4.4 R49.2 R61.1
N9936450: C50.1 J4.5 R50.2 R62.1
N9936454: C51.1 J4.6 R51.2 R63.1
N9936458: C52.1 J4.7 R52.2 R64.1
N9936462: C53.1 J4.8 R53.2 R65.1
N9936466: C54.1 J4.9 R54.2 R66.1
N9936470: C55.1 J4.10 R55.2 R67.1
N9936474: C56.1 J4.11 R56.2 R68.1
N9936478: C57.1 J4.12 R57.2 R69.1
N9941573: J5.1 R70.1
N9941577: J5.2 R71.1
N9941581: J5.3 R72.1
N9941585: J5.4 R73.1
N9941589: J5.5 R74.1
N9941593: J5.6 R75.1
N9941597: J5.7 R76.1
N9941601: J5.8 R77.1
N9941605: J5.9 R78.1
N9941609: J5.10 R79.1
N9941613: J5.11 R80.1
N9941617: J5.12 R81.1
N9944318: J6.3 R82.1
N9944322: J6.2 R85.1
N9944326: J6.1 R84.1
N9944330: J6.7 R88.1
N9944334: J6.6 R87.1
N9944338: J6.5 R86.1
N9944342: J6.4 R83.1
N9944346: J6.11 R92.1
N9944350: J6.10 R91.1
N9944354: J6.9 R90.1
N9944358: J6.8 R89.1
N9944362: J6.12 R93.1
N9945620: LED1.1(A) R21.1
N9946592: R10.2 R11.2 U2.69(PA 10)
N9946643: R12.2 R13.2 U2.68(PA 9)
N9946802: R8.2 U2.76(PA14)
N9946901: R9.2 U2.72(PA 13)
N9947380: J2.2 R5.1 R7.1
N9947430: J2.3 R4.1 R6.1
N9948547: J7.1 R94.1
N9948551: J7.2 R96.1
N9948555: J7.3 R98.1
N9948559: J7.4 R100.1
N9948563: J7.5 R102.1
N9948567: J7.6 R104.1
N9948571: J7.7 R106.1
N9948575: J7.8 R108.1
N9948579: J7.9 R110.1
N9948583: J7.10 R112.1
N9948587: J7.11 R114.1
N9948591: J7.12 R116.1
N9950969: Q23.2(E)
N9950999: Q24.2(E)
N9951692: Q15.2(E)
N9951722: Q16.2(E)
N9952298: Q7.2(E)
N9952328: Q8.2(E)
N9954086: J8.1 R95.1
N9954090: J8.2 R97.1
N9954094: J8.3 R99.1
N9954098: J8.4 R101.1
N9954102: J8.5 R103.1
N9954106: J8.6 R105.1
N9954110: J8.7 R107.1
N9954114: J8.8 R109.1
N9954118: J8.9 R111.1
N9954122: J8.10 R113.1
N9954126: J8.11 R115.1
N9954130: J8.12 R117.1
N9957731: C60.1 R125.2 U3.15(\\R\E\S\E\T)
N9957924: R122.2 U3.3(A0)
N9957928: R123.2 U3.4(A1)
N9957932: R124.2 U3.5(A2)
N9957959: R120.2 U3.1(SCL)
N9958015: R121.2 U3.2(SDA)
N9958062: R162.2 U3.14(IO7)
N9958066: R159.2 U3.13(IO6)
N9958070: R160.2 U3.12(IO5)
N9958074: R161.2 U3.11(IO4)
N9958078: R166.2 U3.10(IO3)
N9958082: R163.2 U3.9(IO2)
N9958086: R164.2 U3.7(IO1)
N9958090: R165.2 U3.6(IO0)
N9958385: C63.1 R131.2 U4.15(\\R\E\S\E\T)
N9958485: R130.2 U4.5(A2)
N9958489: R129.2 U4.4(A1)
N9958493: R128.2 U4.3(A0)
N9958505: R126.2 U4.1(SCL)
N9958541: R127.2 U4.2(SDA)
N9958569: R146.2 U4.14(IO7)
N9958573: R150.2 U4.10(IO3)
N9958577: R145.2 U4.11(IO4)
N9958581: R144.2 U4.12(IO5)
N9958585: R143.2 U4.13(IO6)
N9958589: R149.2 U4.6(IO0)
N9958593: R148.2 U4.7(IO1)
N9958597: R147.2 U4.9(IO2)
N9958865: C66.1 R137.2 U5.15(\\R\E\S\E\T)
N9958949: R136.2 U5.5(A2)
N9958953: R135.2 U5.4(A1)
N9958957: R134.2 U5.3(A0)
N9958969: R132.2 U5.1(SCL)
N9959005: R133.2 U5.2(SDA)
N9959033: R154.2 U5.14(IO7)
N9959037: R158.2 U5.10(IO3)
N9959041: R153.2 U5.11(IO4)
N9959045: R152.2 U5.12(IO5)
N9959049: R151.2 U5.13(IO6)
N9959053: R157.2 U5.6(IO0)
N9959057: R156.2 U5.7(IO1)
N9959061: R155.2 U5.9(IO2)
N9967222: C67.1 C68.1 J5.13 J5.15 J5.17 J5.19 J5.21 J5.23 R138.1
N9968276: C69.1 C70.1 J6.13 J6.15 J6.17 J6.19 J6.21 J6.23 R139.1

Pads without a net: J1 C; J2 1 4 6 7 8 9; NOREF 1; NOREF#2 1; NOREF#3 1; NOREF#4 1; NOREF#5 1; NOREF#6 1; NOREF#7 1; NOREF#8 1; NOREF#9 1; NOREF#10 1; U1 7 8 9 10; U2 4 5 7 15 16 17 18 24 37 57 58 59 60 61 64 65 66 67 70 71 73

## Via types
v1: diameter 0.61, hole 0.305, TOP to BOTTOM, 284 vias

## Routing (per net, layer and track width the routed paths; a pad name or vN(x,y) marks a point on that pad's centre or on a via; arc(x,y) is an arc through that point)
GND: length 337.7
  TOP w0.254: v1(67.58,63.39) 67.85,63.66 U2.27 ; U2.19 66.46,69.33 v1(66.69,69.1) 66.42,68.83 U2.20 ; U2.10 v1(66.66,73.83) ; U2.74 v1(82.44,77.83) ; U2.49 v1(78.85,65.68) ; U2.99 v1(67.85,78.88)
  TOP w0.508: C40.2 v1(52.98,23.92) ; C3.2 v1(119.82,79.77) ; v1(57.93,69.94) Y2.2 ; C43.2 v1(41.55,23.92) ; Q19.2 v1(29.55,95.72) ; C19.1 v1(57.33,60.37) ; C23.1 v1(60.82,65.29) ; C9.2 v1(115.95,64.53) ; C66.2 v1(42.47,92) ; C14.2 v1(111.24,52.5) ; C48.2 v1(116.48,23.92) ; Q9.2 v1(29.28,55.08) ; C34.2 v1(75.84,23.92) ; Q1.2 v1(29.17,24.6) ; Q17.2 v1(29.41,88.1) ; C6.1 v1(104.74,92.95) ; Y2.4 60.92,72.59 v1(60.21,73.3) ; R3.1 v1(109.34,83.94) ; R16.1 v1(69.9,91.58) ; C33.1 v1(86.51,79.93) ; C30.1 v1(67.2,85.36) ; C25.1 v1(86.51,81.46) ; C37.2 v1(64.41,23.92) ; C27.1 60.69,74.22 v1(60.34,74.57) ; C18.1 v1(63.4,69.3) ; Q22.2 v1(29.42,107.15) ; PU1.2 v1(109.39,86.63) ; C36.2 v1(68.22,23.92) ; C49.2 v1(112.67,23.92) ; C29.1 v1(67.83,59.71) ; C58.2 v1(48.4,42.82) ; Q3.2 v1(29.16,32.22) ; PC1.2 v1(114.32,80.79) ; C26.1 v1(81.07,59.74) ; R128.1 v1(42.27,77.49) ; C41.2 v1(49.17,23.92) ; C50.2 v1(108.86,23.92) ; C51.2 v1(105.05,23.92) ; Q6.2 v1(29.3,43.65) ; C55.2 v1(89.81,23.92) ; C59.2 48.91,40.15 v1(49.42,40.66) ; C65.2 v1(48.37,98.31) ; v1(120.79,92.47) 120.26,92.47 D1.2 120.29,93.49 v1(120.79,93.49) ; C7.1 v1(104.74,91.04) ; C63.2 v1(43.48,61.45) ; C47.2 v1(120.29,23.92) ; C32.1 v1(66.34,59.71) ; C64.2 v1(48.37,94.89) ; R135.1 v1(39.99,106.7) ; C44.2 v1(37.74,23.92) ; Q18.2 v1(29.42,91.91) ; C16.1 v1(60.46,75.68) ; C56.2 v1(86,23.92) ; U3.8 35.2,45.74 v1(35.2,45.74) ; C21.1 v1(57.92,63.17) ; Q5.2 v1(29.23,39.84) ; Q10.2 v1(29.3,58.89) ; C39.2 v1(56.79,23.92) ; C60.2 v1(43.54,34.97) ; Q13.2 v1(29.3,72.86) ; Q21.2 v1(29.42,103.34) ; C42.2 v1(45.36,23.92) ; C62.2 v1(49.39,67.87) ; C10.2 v1(107.3,59.1) ; C20.1 v1(57.92,61.9) ; C5.1 v1(104.74,94.85) ; Q4.2 v1(29.23,36.03) ; C45.2 v1(33.93,23.92) ; C57.2 v1(82.19,23.92) ; C15.1 v1(61.64,78.85) ; C28.1 v1(65.71,85.37) ; R134.1 v1(41.64,106.7) ; C61.2 v1(49.39,66.34) ; R18.1 v1(60.6,61.74) ; C4.2 v1(117.67,79.77) ; U5.8 v1(35.96,102.89) ; C24.1 v1(79.55,59.74) ; C22.1 v1(57.92,64.44) ; Q2.2 v1(29.16,28.41) ; Q14.2 v1(29.54,76.67) ; C38.2 v1(60.6,23.92) ; Q11.2 v1(29.3,62.7) ; C8.2 v1(115.95,63.01) ; C46.2 v1(124.1,23.92) ; U1.15 v1(120.03,59.71) ; C17.1 62.51,72.78 v1(61.99,73.3) ; Q20.2 v1(29.41,99.53) ; C52.2 v1(101.24,23.92) ; C54.2 v1(93.62,23.92) ; Q12.2 v1(29.17,66.51) ; C2.2 v1(121.98,79.77) ; C35.2 v1(72.03,23.92) ; C53.2 v1(97.43,23.92) ; U4.8 v1(35.07,71.9) ; C31.1 v1(62.53,78.72)
  GND w0.762: 125.83,68.82 J2.10 ; J2.10 128.5,71.49 ; J2.10 128.5,66.16 ; J2.10 131.17,68.82 ; 74.53,5.73 J3.23 ; J3.23 75.8,7 ; J3.23 74.53,8.27 ; J3.23 73.26,7 ; J3.15 45.32,7 ; J3.15 44.05,8.27 ; J3.15 42.78,7 ; J3.15 44.05,5.73 ; 66.98,129.73 J5.16 ; J5.16 68.25,131 ; J5.16 65.71,131 ; J5.16 66.98,132.27 ; J3.24 78.34,8.27 ; J3.24 79.61,7 ; J3.24 78.34,5.73 ; J3.24 77.07,7 ; TP6.1 61.58,56.06 ; TP6.1 60.31,54.79 ; TP6.1 62.85,54.79 ; J2.5 127.08,51.93 ; J2.5 127.08,49.64 ; J2.5 125.94,50.78 ; J2.5 128.22,50.78 ; J5.14 75.87,131 ; J5.14 73.33,131 ; J5.14 74.6,129.73 ; J5.14 74.6,132.27 ; 87.23,7 J4.14 ; J4.14 88.5,8.27 ; J4.14 88.5,5.73 ; J4.14 89.77,7 ; J4.24 126.6,8.27 ; J4.24 126.6,5.73 ; J4.24 127.87,7 ; J4.24 125.33,7 ; 46.59,7 J3.16 ; J3.16 47.86,5.73 ; J3.16 49.13,7 ; J3.16 47.86,8.27 ; J5.22 45.39,131 ; J5.22 42.85,131 ; J5.22 44.12,132.27 ; J5.22 44.12,129.73 ; J4.13 85.96,7 ; J4.13 84.69,8.27 ; J4.13 83.42,7 ; J4.13 84.69,5.73 ; 117.71,7 J4.22 ; J4.22 120.25,7 ; J4.22 118.98,8.27 ; J4.22 118.98,5.73 ; J4.21 116.44,7 ; J4.21 115.17,5.73 ; J4.21 115.17,8.27 ; J4.21 113.9,7 ; 103.74,5.73 J4.18 ; J4.18 103.74,8.27 ; J4.18 102.47,7 ; J4.18 105.01,7 ; J3.13 37.7,7 ; J3.13 36.43,8.27 ; J3.13 35.16,7 ; J3.13 36.43,5.73 ; 111.36,5.73 J4.20 ; J4.20 111.36,8.27 ; J4.20 110.09,7 ; J4.20 112.63,7 ; J4.23 124.06,7 ; J4.23 122.79,5.73 ; J4.23 121.52,7 ; J4.23 122.79,8.27 ; J6.18 107.62,132.27 ; J6.18 106.35,131 ; J6.18 107.62,129.73 ; J6.18 108.89,131 ; J2.11 131.17,43.82 ; J2.11 128.5,41.16 ; J2.11 128.5,46.49 ; J2.11 125.83,43.82 ; J3.19 60.56,7 ; J3.19 58.02,7 ; J3.19 59.29,8.27 ; J3.19 59.29,5.73 ; 63.1,5.73 J3.20 ; J3.20 63.1,8.27 ; J3.20 61.83,7 ; J3.20 64.37,7 ; 58.09,131 J5.18 ; J5.18 59.36,129.73 ; J5.18 59.36,132.27 ; J5.18 60.63,131 ; J3.18 55.48,8.27 ; J3.18 54.21,7 ; J3.18 56.75,7 ; J3.18 55.48,5.73 ; 70.72,5.73 J3.22 ; J3.22 71.99,7 ; J3.22 70.72,8.27 ; J3.22 69.45,7 ; J4.17 101.2,7 ; J4.17 99.93,8.27 ; J4.17 99.93,5.73 ; J4.17 98.66,7 ; J6.22 93.65,131 ; J6.22 92.38,129.73 ; J6.22 91.11,131 ; J6.22 92.38,132.27 ; J5.24 37.77,131 ; J5.24 35.23,131 ; J5.24 36.5,129.73 ; J5.24 36.5,132.27 ; J6.14 122.86,132.27 ; J6.14 121.59,131 ; J6.14 122.86,129.73 ; J6.14 124.13,131 ; 106.28,7 J4.19 ; J4.19 107.55,8.27 ; J4.19 107.55,5.73 ; J4.19 108.82,7 ; J3.17 52.94,7 ; J3.17 50.4,7 ; J3.17 51.67,8.27 ; J3.17 51.67,5.73 ; 113.97,131 J6.16 ; J6.16 116.51,131 ; J6.16 115.24,129.73 ; J6.16 115.24,132.27 ; 94.85,7 J4.16 ; J4.16 97.39,7 ; J4.16 96.12,8.27 ; J4.16 96.12,5.73 ; J6.20 100,132.27 ; J6.20 100,129.73 ; J6.20 98.73,131 ; J6.20 101.27,131 ; TP5.1 95.3,83.87 ; TP5.1 94.03,85.14 ; TP5.1 94.03,82.6 ; 83.49,131 J6.24 ; J6.24 84.76,129.73 ; J6.24 84.76,132.27 ; J6.24 86.03,131 ; J1.B 132.06,86.5 ; J1.B 130.68,88.88 ; J1.B 130.68,84.12 ; J1.B 129.3,86.5 ; J4.15 93.58,7 ; J4.15 92.31,8.27 ; J4.15 91.04,7 ; J4.15 92.31,5.73 ; 40.24,5.73 J3.14 ; J3.14 40.24,8.27 ; J3.14 41.51,7 ; J3.14 38.97,7 ; 51.74,129.73 J5.20 ; J5.20 50.47,131 ; J5.20 53.01,131 ; J5.20 51.74,132.27 ; 65.64,7 J3.21 ; J3.21 66.91,8.27 ; J3.21 66.91,5.73 ; J3.21 68.18,7
  BOTTOM w0.508: C73.2 v1(15.9,71.87) ; C67.2 v1(40.28,123.08) ; C72.2 v1(15.77,23.61) ; C68.2 v1(78.38,123) ; C71.2 v1(16.03,65.52) ; C70.2 v1(126.64,122.83) ; C69.2 v1(88.54,122.88) ; C74.2 v1(15.97,113.81)
  vias: v1(57.93,73.17) v1(57.93,72.03) v1(57.93,71.01) v1(57.93,68.98) v1(58.94,68.72) v1(59.07,73.42) v1(60.47,68.67) v1(61.87,68.67)
VCC_3V3: length 90.7
  TOP w0.254: C31.2 64.79,75.83 U2.6 ; C33.2 83.61,79.93 82.01,78.33 U2.75 ; U2.28 68.35,63.32 67.83,62.8 C29.2 ; C30.2 67.2,82.26 67.35,82.11 U2.100 ; C24.2 79.55,62.96 79.35,63.17 U2.50 ; U2.11 64.41,73.33 63.52,74.22 C27.2
  TOP w0.508: U3.16 C59.1 C58.1 v1(46.88,42.82) ; R20.2 v1(88.85,79.33) ; R130.1 v1(38.97,77.49) ; v1(46.85,68.94) C62.1 C61.1 46.03,66.34 46,66.31 U4.16 ; v1(119.38,64.53) C9.1 C8.1 118.51,62.99 118.51,60.98 U1.16 ; R30.1 v1(45.34,25.83) ; R33.1 v1(33.91,25.83) ; R129.1 v1(40.62,77.49) ; R27.1 v1(56.77,25.83) ; C11.1 v1(109.2,59.1) ; R53.1 v1(97.41,25.83) ; R123.1 v1(40.5,51.58) ; C30.2 66.31,82.95 66.28,82.98 C28.2 v1(64.75,82.98) ; R50.1 v1(108.84,25.83) ; v1(66.34,63.01) C32.2 67.83,62.12 C29.2 ; C31.2 62.91,77.2 v1(62.5,77.61) ; U5.16 46,95.77 46.03,95.81 C64.1 C65.1 v1(46.85,98.31) ; R25.1 v1(64.39,25.83) ; R28.1 v1(52.96,25.83) ; R137.1 v1(46.51,91.97) ; FB1.1 v1(57.33,58.72) ; R32.1 v1(37.72,25.83) ; R55.1 v1(89.79,25.83) ; R136.1 v1(38.34,106.79) ; R118.2 v1(45.45,55.13) ; R57.1 v1(82.17,25.83) ; R125.1 45.92,36.03 v1(46.37,35.58) ; C27.2 62.79,74 v1(63.39,73.4) ; R52.1 v1(101.22,25.83) ; R15.2 v1(68.25,91.58) ; R56.1 v1(85.98,25.83) ; R14.2 v1(62.47,65.17) ; R51.1 v1(105.03,25.83) ; C33.2 C25.2 v1(83.23,81.46) ; R124.1 v1(38.84,51.58) ; C24.2 C26.2 v1(81.07,63.23) ; R119.2 v1(42.56,54.11) ; R48.1 v1(116.46,25.83) ; R24.1 v1(68.2,25.83) ; R122.1 v1(42.15,51.58) ; R19.2 v1(80.11,88.07) ; R131.1 v1(46.32,62.38) ; R26.1 v1(60.58,25.83) ; R17.2 v1(60.63,63.42) ; R23.1 v1(72.01,25.83) ; R46.1 v1(124.08,25.83) ; R49.1 v1(112.65,25.83) ; R31.1 v1(41.53,25.83) ; R21.2 v1(89.28,68.83) ; R54.1 v1(93.6,25.83) ; R22.1 v1(75.82,25.83) ; R29.1 v1(49.15,25.83) ; R47.1 v1(120.27,25.83)
  vias: v1(108.22,94.89) v1(108.22,94.12) v1(108.22,93.36) v1(108.22,92.6) v1(108.22,91.84) v1(108.22,91.08) v1(108.98,94.89) v1(108.98,94.12) v1(108.98,93.36) v1(108.98,92.6) v1(108.98,91.84) v1(108.98,91.08) v1(109.74,94.89) v1(109.74,94.12) v1(109.74,93.36) v1(109.74,92.6) v1(109.74,91.84) v1(109.74,91.08)
VCC_12V: length 15
  TOP w0.762: J1.A 124.38,88.88 ; J1.A 125.76,86.5 ; J1.A 124.38,84.12 ; J1.A 123,86.5
  VCC w0.762: 123,86.5 J1.A ; J1.A 125.76,86.5 ; J1.A 124.38,84.12 ; J1.A 124.38,88.88
  vias: v1(1.54,112.54) v1(1.54,111.78) v1(1.67,64.15) v1(1.67,63.39) v1(2.3,112.54) v1(2.32,111.78) v1(2.43,64.15) v1(2.45,63.39) v1(76.6,136.54) v1(76.6,135.78) v1(77.36,136.54) v1(77.38,135.78) v1(117.75,87.14) v1(117.75,86.38) v1(117.75,85.61) v1(118.51,87.14) v1(118.51,86.38) v1(118.51,85.61) v1(119.27,87.14) v1(119.27,86.38) v1(119.27,85.61) v1(120.03,87.14) v1(120.03,86.38) v1(120.03,85.61) v1(120.79,87.14) v1(120.79,86.38) v1(120.79,85.61) v1(121.56,87.14) v1(121.56,86.38) v1(121.56,85.61) v1(122.32,87.14) v1(122.32,86.38) v1(122.32,85.61) v1(124.86,136.54) v1(124.86,135.78) v1(125.62,136.54) v1(125.64,135.78)
VCC_12V_LED1: length 61
  BOTTOM w0.762: J7.16 8.27,54.12 ; J7.16 7,55.39 ; J7.16 7,52.85 ; J7.16 5.73,54.12 ; 5.73,46.5 J7.18 ; J7.18 7,45.23 ; J7.18 8.27,46.5 ; J7.18 7,47.77 ; 7,37.61 J7.20 ; J7.20 8.27,38.88 ; J7.20 5.73,38.88 ; J7.20 7,40.15 ; 5.73,42.69 J7.19 ; J7.19 7,41.42 ; J7.19 7,43.96 ; J7.19 8.27,42.69 ; J7.21 7,36.34 ; J7.21 5.73,35.07 ; J7.21 8.27,35.07 ; J7.21 7,33.8 ; 7,29.99 J7.22 ; J7.22 5.73,31.26 ; J7.22 8.27,31.26 ; J7.22 7,32.53 ; 5.73,50.31 J7.17 ; J7.17 7,51.58 ; J7.17 7,49.04 ; J7.17 8.27,50.31 ; J7.23 7,28.72 ; J7.23 5.73,27.45 ; J7.23 7,26.18 ; J7.23 8.27,27.45 ; 5.73,65.55 J7.13 ; J7.13 8.27,65.55 ; J7.13 7,64.28 ; J7.13 7,66.82 ; 7,60.47 J7.14 ; J7.14 8.27,61.74 ; J7.14 5.73,61.74 ; J7.14 7,63.01 ; 5.73,23.64 J7.24 ; J7.24 7,22.37 ; J7.24 7,24.91 ; J7.24 8.27,23.64 ; 7,56.66 J7.15 ; J7.15 8.27,57.93 ; J7.15 5.73,57.93 ; J7.15 7,59.2
VCC_12V_LED2: length 61
  BOTTOM w0.762: 5.73,79.52 J8.22 ; J8.22 7,78.25 ; J8.22 8.27,79.52 ; J8.22 7,80.79 ; 5.73,94.76 J8.18 ; J8.18 8.27,94.76 ; J8.18 7,96.03 ; J8.18 7,93.49 ; 5.73,75.71 J8.23 ; J8.23 7,74.44 ; J8.23 7,76.98 ; J8.23 8.27,75.71 ; J8.17 7,99.84 ; J8.17 5.73,98.57 ; J8.17 8.27,98.57 ; J8.17 7,97.3 ; 7,85.87 J8.20 ; J8.20 7,88.41 ; J8.20 8.27,87.14 ; J8.20 5.73,87.14 ; 7,82.06 J8.21 ; J8.21 8.27,83.33 ; J8.21 7,84.6 ; J8.21 5.73,83.33 ; J8.15 7,107.46 ; J8.15 5.73,106.19 ; J8.15 7,104.92 ; J8.15 8.27,106.19 ; 7,89.68 J8.19 ; J8.19 8.27,90.95 ; J8.19 5.73,90.95 ; J8.19 7,92.22 ; 5.73,113.81 J8.13 ; J8.13 7,115.08 ; J8.13 7,112.54 ; J8.13 8.27,113.81 ; 7,101.11 J8.16 ; J8.16 5.73,102.38 ; J8.16 8.27,102.38 ; J8.16 7,103.65 ; 5.73,110 J8.14 ; J8.14 7,111.27 ; J8.14 8.27,110 ; J8.14 7,108.73 ; 5.73,71.9 J8.24 ; J8.24 8.27,71.9 ; J8.24 7,70.63 ; J8.24 7,73.17
BOOT0: length 10.8
  TOP w0.254: U2.94 70.35,86.02 69.9,86.47 R16.2 R15.1
CLK_24M_IN: length 7.8
  TOP w0.254: U2.12 64.45,72.83 63.46,71.84 C17.2 62.63,71.84 61.87,71.07 59.71,71.07 59.32,71.46 Y2.1
CLK_24M_OUT: length 6.1
  TOP w0.254: U2.13 64.58,72.33 63.52,71.26 63.52,70.54 63.22,70.24 C18.2 62.04,70.24 61.74,69.94 Y2.3
CLK_32K768_IN: length 7.2
  TOP w0.254: Y1.1 59.98,78.1 60.9,77.18 C15.2 62.05,77.18 64.39,74.83 U2.8
CLK_32K768_OUT: length 7.3
  TOP w0.254: U2.9 64.13,74.33 62.79,75.68 C16.2 62.11,76.09 61.74,76.47 60.85,76.47 60.12,77.2 Y1.2
DEBUG_RX: length 18.3
  TOP w0.254: TP3.1 65.04,53.17 65.04,64.02 65.6,64.58 U2.26
DEBUG_TX: length 16.3
  TOP w0.254: TP4.1 64.53,55.2 64.53,66.15 64.72,66.33 U2.25
IIC_SCL: length 108
  TOP w0.254: R132.1 v1(44.94,106.7) ; U2.63 82.1,72.33 v1(82.19,72.41) ; R120.1 v1(45.45,51.49) R118.1 ; R126.1 45.58,76.98 v1(44.94,77.61)
  BOTTOM w0.254: v1(44.94,106.7) v1(44.94,77.61) 44.94,76.82 42.82,74.69 42.82,60.6 44.72,58.69 44.72,52.22 v1(45.45,51.49) 51.62,51.49 72.54,72.41 v1(82.19,72.41)
IIC_SDA: length 111.8
  TOP w0.254: R121.1 v1(43.8,51.54) R119.1 ; R127.1 v1(43.93,77.61) ; R133.1 43.29,106.06 v1(43.93,106.7) ; U2.62 82.5,71.83 v1(83.07,72.41)
  BOTTOM w0.254: v1(43.93,106.7) v1(43.93,77.61) 43.92,76.8 41.99,74.91 41.99,60.03 43.8,58.22 v1(43.8,51.54) 44.65,50.69 51.83,50.69 72.91,71.77 82.44,71.77 v1(83.07,72.41)
KEY_1: length 40.1
  TOP w0.254: U2.29 68.85,35.65 R34.2
KEY_2: length 38.3
  TOP w0.254: U2.30 69.35,36.1 72.54,32.91 72.54,32.81 v1(72.95,32.4) ; R35.2 v1(72.95,28.81)
  BOTTOM w0.254: v1(72.95,28.81) v1(72.95,32.4)
KEY_3: length 40.2
  TOP w0.254: U2.31 69.85,36.48 v1(73.04,33.29) ; R36.2 v1(69.14,28.81)
  BOTTOM w0.254: v1(73.04,33.29) 72.28,33.29 69.14,30.15 v1(69.14,28.81)
KEY_4: length 42.7
  TOP w0.254: R37.2 v1(65.33,28.81) ; U2.32 70.35,37 v1(73.17,34.18)
  BOTTOM w0.254: v1(65.33,28.81) 70.7,34.18 v1(73.17,34.18)
KEY_5: length 45.8
  TOP w0.254: R38.2 v1(61.52,28.81) ; U2.33 70.85,37.39 v1(73.17,35.07)
  BOTTOM w0.254: v1(73.17,35.07) 67.78,35.07 v1(61.52,28.81)
KEY_6: length 48.9
  TOP w0.254: v1(73.17,35.96) 71.35,37.78 U2.34 ; R39.2 v1(57.71,28.81)
  BOTTOM w0.254: v1(73.17,35.96) 64.86,35.96 v1(57.71,28.81)
KEY_7: length 51.9
  TOP w0.254: R40.2 v1(53.9,28.81) ; v1(73.17,36.85) 71.85,38.17 U2.35
  BOTTOM w0.254: v1(53.9,28.81) 61.94,36.85 v1(73.17,36.85)
KEY_8: length 55
  TOP w0.254: R41.2 v1(50.09,28.81) ; v1(73.17,37.74) 72.35,38.56 U2.36
  BOTTOM w0.254: v1(50.09,28.81) 59.02,37.74 v1(73.17,37.74)
KEY_9: length 58.6
  TOP w0.254: R42.2 v1(46.28,28.81) ; v1(73.35,39.26) U2.38
  BOTTOM w0.254: v1(46.28,28.81) 46.28,30.2 55.34,39.26 v1(73.35,39.26)
KEY_10: length 61.7
  TOP w0.254: R43.2 v1(42.47,28.81) ; U2.39 73.85,40.61 v1(74.06,40.4)
  BOTTOM w0.254: v1(42.47,28.81) 54.07,40.4 v1(74.06,40.4)
KEY_11: length 66.1
  TOP w0.254: R44.2 v1(38.66,28.81) ; v1(74.95,41.16) 74.35,41.76 U2.40
  BOTTOM w0.254: v1(38.66,28.81) 51.02,41.16 v1(74.95,41.16)
KEY_12: length 69.2
  TOP w0.254: v1(74.95,42.05) 74.85,42.15 U2.41 ; R45.2 v1(34.85,28.81)
  BOTTOM w0.254: v1(34.85,28.81) 48.1,42.05 v1(74.95,42.05)
KEY_13: length 78.2
  TOP w0.254: v1(76.34,42.05) 76.34,55.39 75.35,56.39 U2.42 ; R58.2 v1(125.02,28.81)
  BOTTOM w0.254: v1(76.34,42.05) 111.78,42.05 v1(125.02,28.81)
KEY_14: length 74.3
  TOP w0.254: v1(76.98,41.16) 76.98,55.9 75.85,57.03 U2.43 ; R59.2 v1(121.21,28.81)
  BOTTOM w0.254: v1(76.98,41.16) 108.86,41.16 v1(121.21,28.81)
KEY_15: length 70.4
  TOP w0.254: v1(77.61,40.28) 77.61,56.15 76.35,57.42 U2.44 ; R60.2 v1(117.4,28.81)
  BOTTOM w0.254: v1(117.4,28.81) 105.93,40.28 v1(77.61,40.28)
KEY_16: length 66.5
  TOP w0.254: U2.45 76.85,57.81 78.38,56.28 v1(78.38,39.39) ; R61.2 v1(113.59,28.81)
  BOTTOM w0.254: v1(78.38,39.39) 103.01,39.39 v1(113.59,28.81)
KEY_17: length 62.5
  TOP w0.254: U2.46 77.35,58.45 79.26,56.53 v1(79.26,38.5) ; R62.2 v1(109.78,28.81)
  BOTTOM w0.254: v1(79.26,38.5) 100.09,38.5 v1(109.78,28.81)
KEY_18: length 58.5
  TOP w0.254: R63.2 v1(105.97,28.81) ; U2.47 77.85,59.09 80.15,56.79 v1(80.15,37.61)
  BOTTOM w0.254: v1(105.97,28.81) 97.17,37.61 v1(80.15,37.61)
KEY_19: length 54.5
  TOP w0.254: v1(80.92,36.72) 80.92,56.91 78.35,59.48 U2.48 ; R64.2 v1(102.16,28.81)
  BOTTOM w0.254: v1(102.16,28.81) 94.25,36.72 v1(80.92,36.72)
KEY_20: length 52.3
  TOP w0.254: R65.2 v1(98.35,28.81) ; U2.51 81.98,66.33 82.31,65.99 82.31,57.67 81.8,57.17 v1(81.8,35.83)
  BOTTOM w0.254: v1(81.8,35.83) 91.33,35.83 v1(98.35,28.81)
KEY_21: length 48.9
  TOP w0.254: v1(82.57,34.94) 82.57,57.17 82.82,57.42 82.82,66.18 82.17,66.83 U2.52 ; R66.2 v1(94.54,28.81)
  BOTTOM w0.254: v1(82.57,34.94) 88.41,34.94 v1(94.54,28.81)
KEY_22: length 46
  TOP w0.254: R67.2 v1(90.73,28.81) ; v1(83.07,34.05) 83.3,34.28 83.3,66.46 82.43,67.33 U2.53
  BOTTOM w0.254: v1(83.07,34.05) 85.49,34.05 v1(90.73,28.81)
KEY_23: length 43.4
  TOP w0.254: U2.54 82.7,67.83 83.84,66.69 83.84,31.89 86.92,28.81 R68.2
KEY_LED_1: length 1.9
  TOP w0.508: Q1.3 R94.2
KEY_LED_2: length 1.9
  TOP w0.508: Q2.3 R96.2
KEY_LED_3: length 1.9
  TOP w0.508: Q3.3 R98.2
KEY_LED_4: length 1.9
  TOP w0.508: Q4.3 R100.2
KEY_LED_5: length 1.7
  TOP w0.508: Q5.3 R102.2
KEY_LED_6: length 1.9
  TOP w0.508: Q6.3 R104.2
KEY_LED_7: length 1.9
  TOP w0.508: Q7.3 R106.2
KEY_LED_8: length 1.9
  TOP w0.508: Q8.3 R108.2
KEY_LED_9: length 1.9
  TOP w0.508: Q9.3 R110.2
KEY_LED_10: length 1.9
  TOP w0.508: Q10.3 R112.2
KEY_LED_11: length 1.9
  TOP w0.508: Q11.3 R114.2
KEY_LED_12: length 1.9
  TOP w0.508: Q12.3 R116.2
KEY_LED_13: length 1.9
  TOP w0.508: Q13.3 R95.2
KEY_LED_14: length 1.9
  TOP w0.508: Q14.3 R97.2
KEY_LED_15: length 1.9
  TOP w0.508: Q15.3 R99.2
KEY_LED_16: length 1.9
  TOP w0.508: Q16.3 R101.2
KEY_LED_17: length 1.9
  TOP w0.508: Q17.3 R103.2
KEY_LED_18: length 1.9
  TOP w0.508: Q18.3 R105.2
KEY_LED_19: length 1.9
  TOP w0.508: Q19.3 R107.2
KEY_LED_20: length 1.9
  TOP w0.508: Q20.3 R109.2
KEY_LED_21: length 1.9
  TOP w0.508: Q21.3 R111.2
KEY_LED_22: length 1.9
  TOP w0.508: Q22.3 R113.2
KEY_LED_23: length 1.9
  TOP w0.508: Q23.3 R115.2
KEY_LED_24: length 1.9
  TOP w0.508: Q24.3 R117.2
LED: length 2.4
  TOP w0.254: U2.56 LED1.2
LED_1: length 50.5
  TOP w0.254: U2.3 64.72,77.33 64.25,77.79 64.25,79.77 49.67,94.35 49.67,103.39 44.09,108.98 39.34,108.98 36.5,111.82 R70.2
LED_2: length 47
  TOP w0.254: U2.2 64.91,77.83 64.66,78.08 64.66,80.66 50.69,94.63 50.69,103.78 44.09,110.38 41.92,110.38 40.31,111.98 R71.2
LED_3: length 43.2
  TOP w0.254: R72.2 44.12,111.98 51.83,104.27 51.83,94.76 65.6,80.99 U2.1
LED_4: length 43.9
  TOP w0.254: R73.2 47.93,111.61 52.98,106.57 52.98,95.77 61.61,87.14 66.56,87.14 68.35,85.36 U2.98
LED_5: length 41.6
  TOP w0.254: U2.97 68.85,85.49 66.25,88.09 62.94,88.09 54.25,96.79 54.25,108.35 51.74,110.85 R74.2
LED_6: length 39.1
  TOP w0.254: R75.2 55.55,98.02 64.41,89.17 65.8,89.17 69.35,85.63 U2.96
LED_7: length 36.9
  TOP w0.254: R76.2 59.36,96.24 69.85,85.76 U2.95
LED_8: length 35.8
  TOP w0.254: R77.2 63.17,104.5 70.85,96.83 U2.93
LED_9: length 34.4
  TOP w0.254: U2.92 71.35,98.1 66.98,102.47 R78.2
LED_10: length 33
  TOP w0.254: R79.2 70.79,100.31 71.85,99.26 U2.91
LED_11: length 33.5
  TOP w0.254: U2.90 72.35,99.27 74.6,101.53 R80.2
LED_12: length 34.9
  TOP w0.254: U2.89 72.85,99.01 78.41,104.58 R81.2
LED_13: length 37.3
  TOP w0.254: U2.88 73.35,98.49 84.76,109.91 R84.2
LED_14: length 38.7
  TOP w0.254: U2.87 73.85,97.72 87.97,111.84 87.97,112.07 R85.2
LED_15: length 41.8
  TOP w0.254: R82.2 92.38,111.98 91.79,111.4 88.79,111.4 74.35,96.95 U2.86
LED_16: length 44.6
  TOP w0.254: R83.2 96.19,111.94 94.76,110.51 89.3,110.51 74.85,96.05 U2.85
LED_17: length 47.4
  TOP w0.254: R86.2 100,111.98 97.58,109.56 89.75,109.56 75.35,95.16 U2.84
LED_18: length 50.2
  TOP w0.254: R87.2 103.81,111.94 100.55,108.68 90.27,108.68 75.85,94.26 U2.83
LED_19: length 53
  TOP w0.254: U2.82 76.35,93.36 90.82,107.84 103.48,107.84 107.62,111.98 R88.2
LED_20: length 55.7
  TOP w0.254: R89.2 111.43,111.98 106.27,106.82 91.2,106.82 76.85,92.47 U2.81
LED_21: length 58.5
  TOP w0.254: R90.2 115.24,111.94 109.11,105.81 91.71,105.81 77.35,91.44 U2.80
LED_22: length 61.2
  TOP w0.254: U2.79 77.85,90.55 91.96,104.66 111.73,104.66 119.05,111.98 R91.2
LED_23: length 64
  TOP w0.254: U2.78 78.35,89.52 92.35,103.52 114.4,103.52 122.86,111.98 R92.2
LED_24: length 66.8
  TOP w0.254: R93.2 126.67,111.81 117.24,102.38 92.6,102.38 78.85,88.62 U2.77
LED_CL_1: length 2.4
  TOP w0.508: R162.1 Q1.1
LED_CL_2: length 2.4
  TOP w0.508: R159.1 Q2.1
LED_CL_3: length 2.4
  TOP w0.508: R160.1 Q3.1
LED_CL_4: length 2.4
  TOP w0.508: R161.1 Q4.1
LED_CL_5: length 2.3
  TOP w0.508: R166.1 Q5.1
LED_CL_6: length 2.4
  TOP w0.508: Q6.1 R163.1
LED_CL_7: length 2.4
  TOP w0.508: Q7.1 R164.1
LED_CL_8: length 2.4
  TOP w0.508: Q8.1 R165.1
LED_CL_9: length 2.4
  TOP w0.508: Q9.1 R146.1
LED_CL_10: length 2.4
  TOP w0.508: Q10.1 R143.1
LED_CL_11: length 2.4
  TOP w0.508: R144.1 Q11.1
LED_CL_12: length 2.4
  TOP w0.508: R145.1 Q12.1
LED_CL_13: length 2.4
  TOP w0.508: R150.1 Q13.1
LED_CL_14: length 2.4
  TOP w0.508: R147.1 Q14.1
LED_CL_15: length 2.4
  TOP w0.508: R148.1 Q15.1
LED_CL_16: length 2.4
  TOP w0.508: R149.1 Q16.1
LED_CL_17: length 2.4
  TOP w0.508: R154.1 Q17.1
LED_CL_18: length 2.4
  TOP w0.508: R151.1 Q18.1
LED_CL_19: length 2.4
  TOP w0.508: R152.1 Q19.1
LED_CL_20: length 2.4
  TOP w0.508: R153.1 Q20.1
LED_CL_21: length 2.4
  TOP w0.508: R158.1 Q21.1
LED_CL_22: length 2.4
  TOP w0.508: R155.1 Q22.1
LED_CL_23: length 2.4
  TOP w0.508: R156.1 Q23.1
LED_CL_24: length 2.4
  TOP w0.508: R157.1 Q24.1
RESET_N: length 7.9
  TOP w0.254: U2.14 64.78,71.83 64.02,71.07 64.02,68.6 63.17,67.74 R14.1 C23.2
RX: length 46.4
  TOP w0.203: R13.1 v1(87.16,72.28) ; U1.12 117.8,55.9 117.39,55.49 116.38,55.49 115.99,55.87 115.99,61.91 103.59,74.31 v1(88.15,74.31) 87.65,74.82 R11.1
  BOTTOM w0.203: v1(88.15,74.31) 87.16,73.32 v1(87.16,72.28)
SWCLK: length 10.5
  TOP w0.254: TP1.1 88.54,83.87 88.52,83.89 R8.1 R19.1
SWSDIO: length 8.9
  TOP w0.254: R9.1 R20.1 87.27,79.65 TP2.1
TX: length 47.6
  TOP w0.203: R10.1 v1(87.16,75.73) ; U1.11 117.8,54.63 117.34,55.08 116.21,55.08 115.59,55.7 115.59,61.74 103.42,73.9 88.57,73.9 v1(88.15,73.49) 87.84,73.17 R12.1
  BOTTOM w0.203: v1(87.16,75.73) 87.88,75.73 88.79,74.82 88.79,74.12 v1(88.15,73.49)
WAKE: length 7.2
  TOP w0.254: R18.2 63.16,62.43 63.19,62.46 R17.1 63.19,63.83 64.02,64.66 64.02,66.82 64.54,67.33 U2.23
N00530: length 5
  TOP w0.508: PU1.4 113.05,84.97 114.08,83.94 R1.1 PC1.1
N00636: length 3.9
  TOP w0.508: PU1.3 109.16,85.68 108.99,85.51 R3.2 R2.1
N00810: length 1.9
  TOP w0.508: C1.1 111.26,89.14 110.41,88.29 PU1.1
N9918491: length 15.1
  TOP w0.254: C22.2 63.04,64.44 63.52,64.91 63.52,67.2 64.15,67.83 U2.22 U2.21
  TOP w0.508: FB1.2 C19.2 59.87,61.23 59.57,61.52 C20.2 C21.2 C22.2
N9930204: length 7.8
  TOP w0.254: U1.1 111.28,60.98 110.52,61.74 106.7,61.74 106.35,61.39 C12.1
N9930224: length 7.2
  TOP w0.254: C12.2 106.35,58.78 106.9,58.24 110.63,58.24 110.83,58.44 U1.3
N9930232: length 6.2
  TOP w0.254: C13.1 108.38,54.71 110.84,57.17 U1.4
N9930252: length 7
  TOP w0.254: C13.2 109.14,52.5 109.36,52.72 109.36,54.5 110.76,55.9 U1.5
N9930268: length 2.9
  TOP w0.254: C14.1 111.22,54.02 111.82,54.63 U1.6
N9930340: length 5
  TOP w0.254: C10.1 C11.2 110.47,60.63 111.4,59.71 U1.2
N9930446: length 5.7
  TOP w0.203: R4.2 R5.2 121.56,58.19 121.3,57.93 120.16,57.93 119.65,58.44 U1.14
N9930462: length 5.7
  TOP w0.203: U1.13 119.8,57.17 120.16,57.52 121.2,57.52 121.56,57.16 R6.2 R7.2
N9933455: length 8.1
  TOP w0.508: R34.1 R22.2 C34.1 J3.1
N9933457: length 8.1
  TOP w0.508: R35.1 R23.2 C35.1 J3.2
N9933459: length 8.1
  TOP w0.508: J3.3 C36.1 R24.2 R36.1
N9933461: length 8.1
  TOP w0.508: R37.1 R25.2 C37.1 J3.4
N9933463: length 8.1
  TOP w0.508: J3.5 C38.1 R26.2 R38.1
N9933465: length 8.1
  TOP w0.508: J3.6 C39.1 R27.2 R39.1
N9933467: length 8.1
  TOP w0.508: J3.7 C40.1 R28.2 R40.1
N9933469: length 8.1
  TOP w0.508: J3.8 C41.1 R29.2 R41.1
N9933471: length 8.1
  TOP w0.508: R42.1 R30.2 C42.1 J3.9
N9933473: length 8.1
  TOP w0.508: R43.1 R31.2 C43.1 J3.10
N9933475: length 8.1
  TOP w0.508: R44.1 R32.2 C44.1 J3.11
N9933477: length 8.1
  TOP w0.508: J3.12 C45.1 R33.2 R45.1
N9936434: length 8.1
  TOP w0.508: J4.1 C46.1 R46.2 R58.1
N9936438: length 8.1
  TOP w0.508: J4.2 C47.1 R47.2 R59.1
N9936442: length 8.1
  TOP w0.508: R60.1 R48.2 C48.1 J4.3
N9936446: length 8.1
  TOP w0.508: R61.1 R49.2 C49.1 J4.4
N9936450: length 8.1
  TOP w0.508: J4.5 C50.1 R50.2 R62.1
N9936454: length 8.1
  TOP w0.508: J4.6 C51.1 R51.2 R63.1
N9936458: length 8.1
  TOP w0.508: J4.7 C52.1 R52.2 R64.1
N9936462: length 8.1
  TOP w0.508: R65.1 R53.2 C53.1 J4.8
N9936466: length 8.1
  TOP w0.508: R66.1 R54.2 C54.1 J4.9
N9936470: length 8.1
  TOP w0.508: J4.10 C55.1 R55.2 R67.1
N9936474: length 8.1
  TOP w0.508: J4.11 C56.1 R56.2 R68.1
N9936478: length 8.1
  TOP w0.508: R69.1 R57.2 C57.1 J4.12
N9941573: length 4.3
  TOP w0.508: R70.1 J5.1
N9941577: length 4.2
  TOP w0.508: R71.1 J5.2
N9941581: length 4.2
  TOP w0.508: R72.1 J5.3
N9941585: length 4.2
  TOP w0.508: R73.1 J5.4
